# EAGLE board axiom_beta_plugin_module_TE0714_SDI_v0.6-Beta.730f7630 (EAGLE 7.7.0)
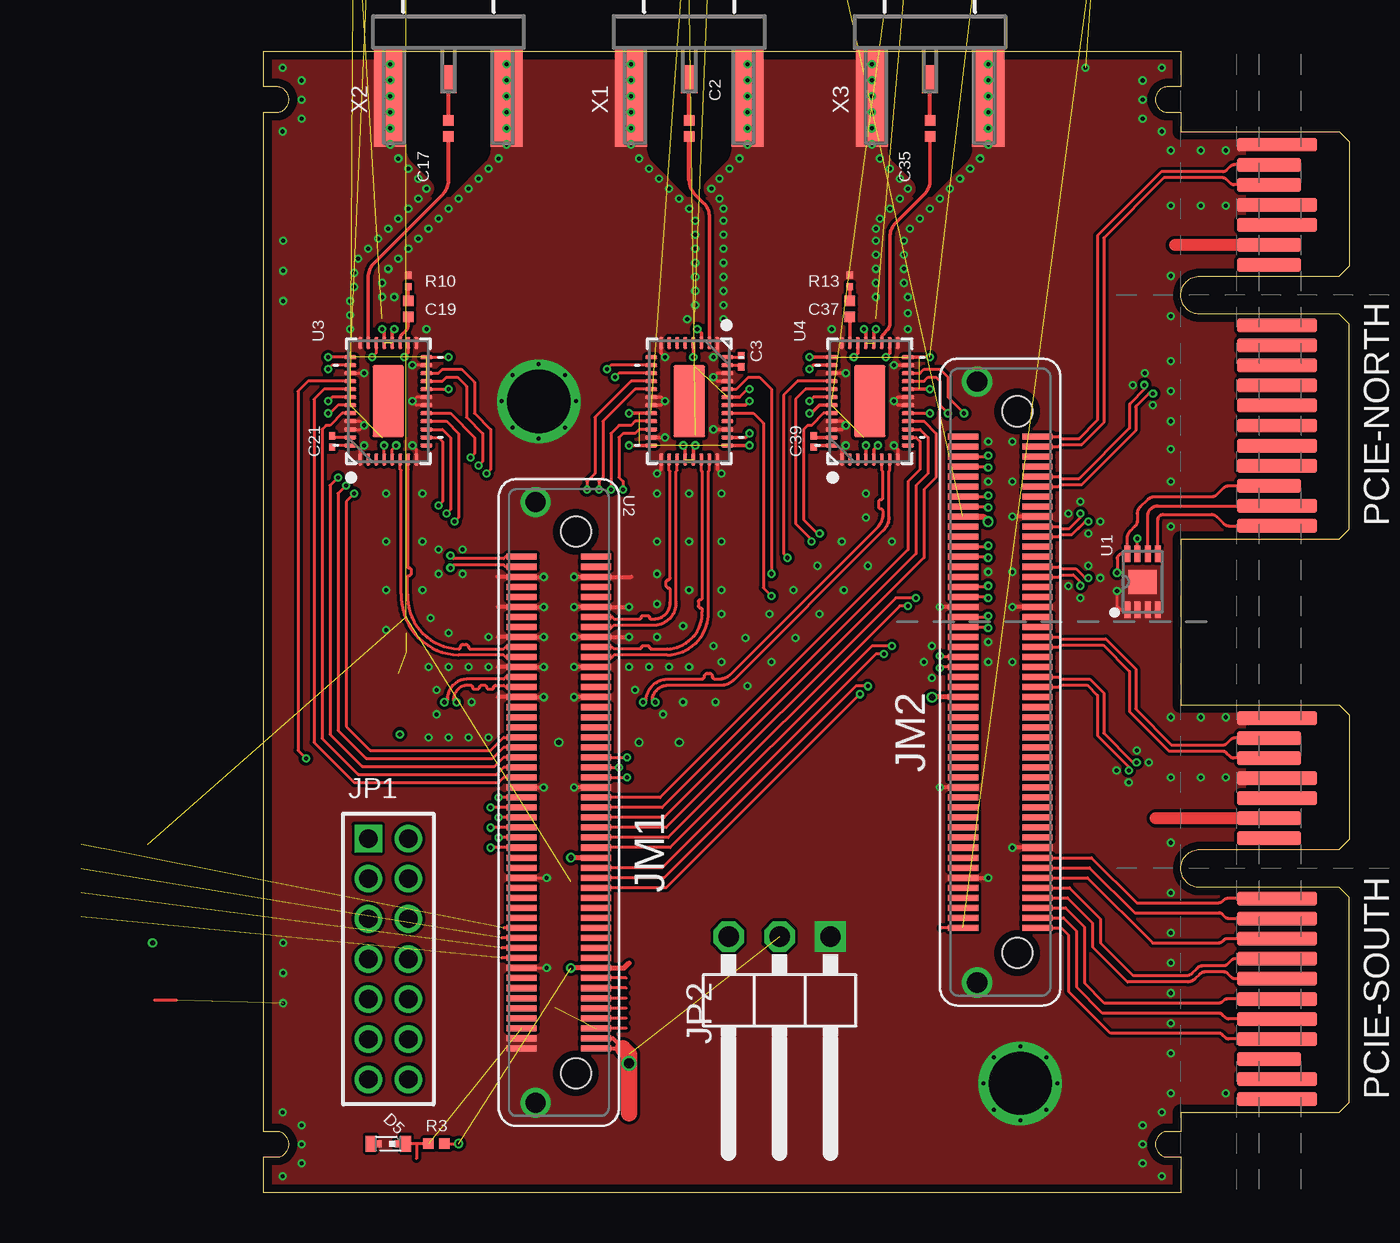
[diagram p0: board, top side]
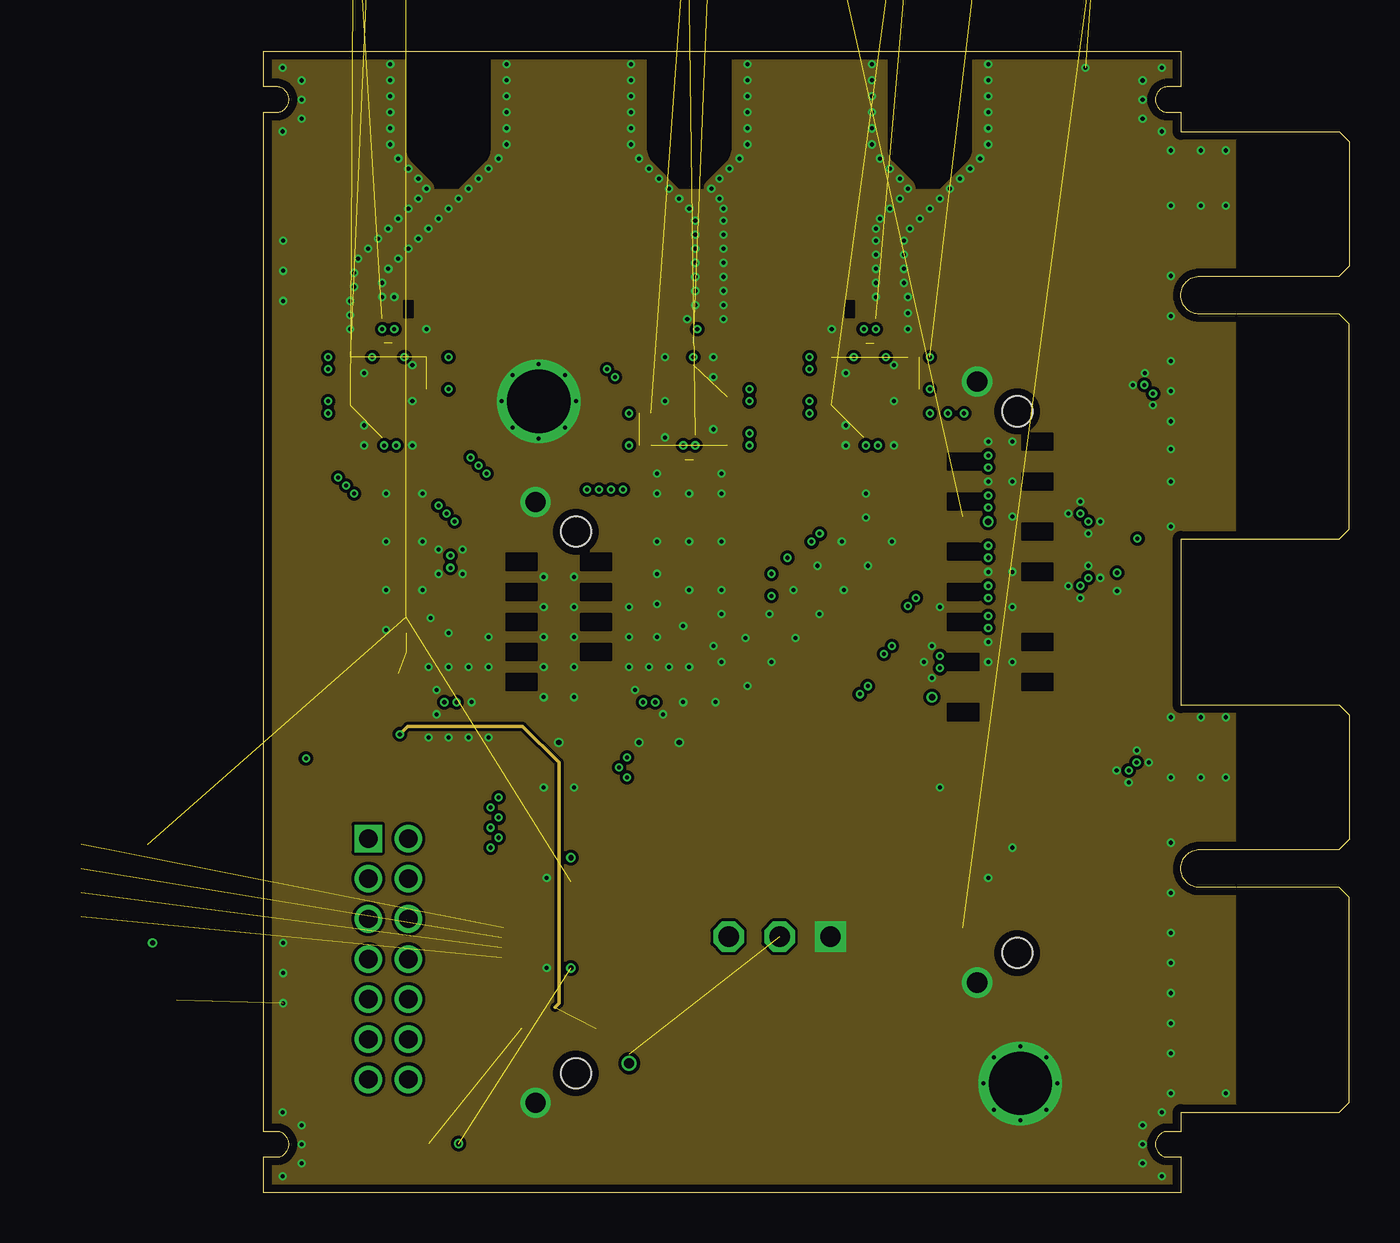
[diagram p1: board, inner layer Route2]
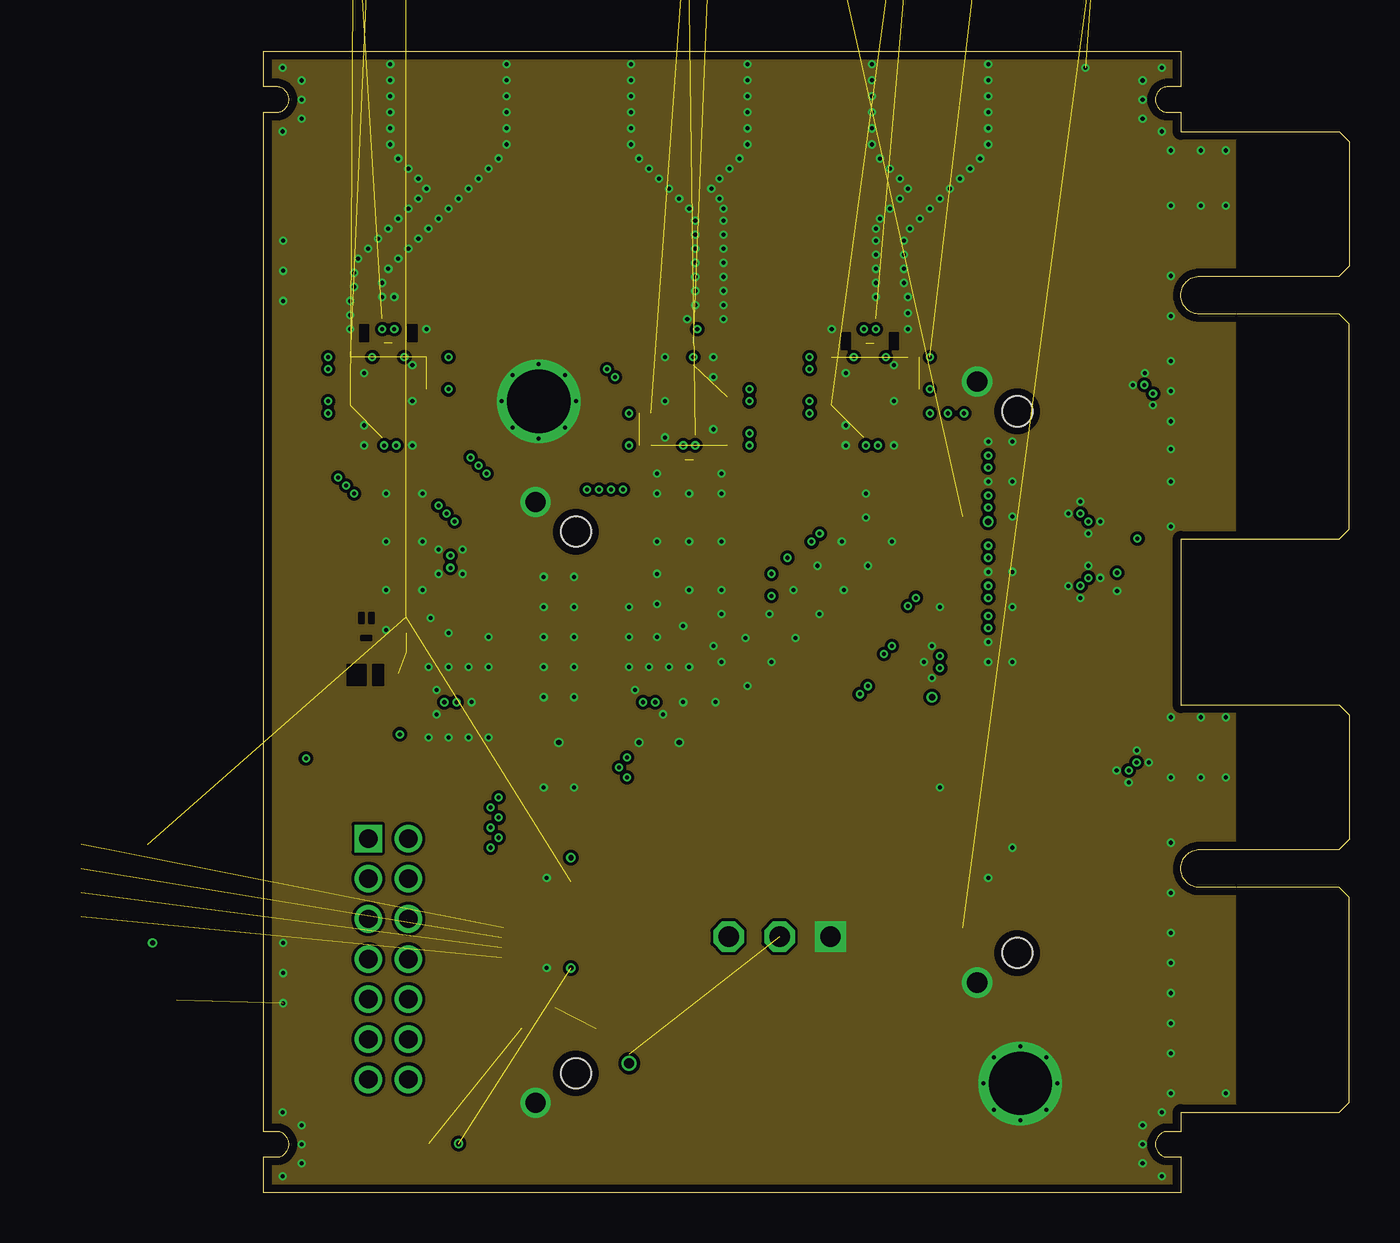
[diagram p2: board, inner layer Route15]
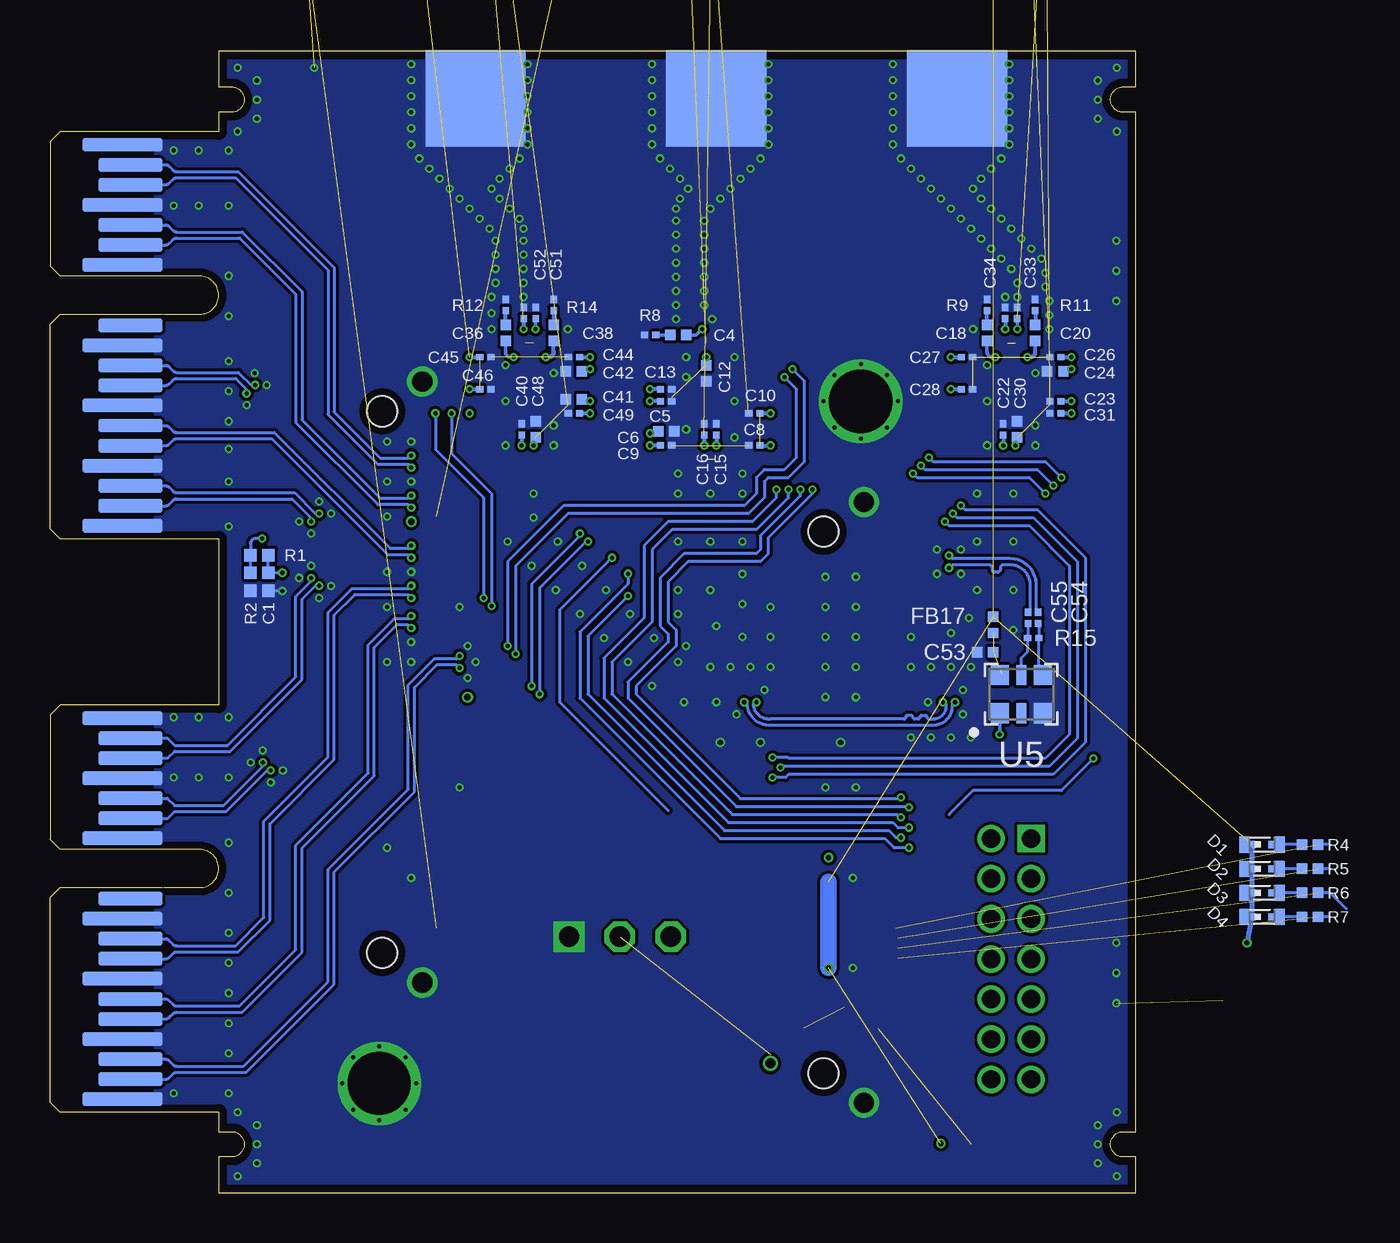
[diagram p3: board, bottom side, seen from below]

Size 54.12 x 56.9 mm. Coordinates in mm from the lower left corner, seen from the top.
Outline: 45.72,32.59 45.72,24.31
Outline: 45.72,52.89 45.72,53.85 45.09,53.85 arc-90 44.45,54.48 arc-90 45.09,55.12 45.72,55.12 45.72,56.9 0,56.9 0,55.12 0.63,55.12 arc-90 1.27,54.48 arc-90 0.63,53.85 0,53.85 0,3.05 0.63,3.05 arc-90 1.27,2.41 arc-90 0.63,1.78 0,1.78 0,0 45.72,0 45.72,1.78 45.09,1.78 arc-90 44.45,2.41 arc-90 45.09,3.05 45.72,3.05 45.72,4.01
Copper layers (1*2*15*16): Top 0.035559375mm / dielectric 0.17018125mm / Route2 0.01778125mm / dielectric 47mil / Route15 0.01778125mm / dielectric 0.17018125mm / Bottom 0.035559375mm
Design rules "OSHPark-4layer-tuned *": minimum track width 5mil, minimum drill 8mil, track to track 5mil, track to pad 5mil, pad to pad 5mil, via to via 5mil, smd to smd 5mil, copper to edge 15mil, drill to drill 6mil, minimum pad ring 4mil, minimum via ring 4mil, stop-mask expansion 2mil, vias tented up to drill 25mil, thermal gap 6mil
Net classes: 0 default: width 0.152 mm, drill 0.203 mm, clearance 0.152 mm; 1 LVDS: width 0.152 mm, drill 0.203 mm, clearance 0.152 mm; 2 75Ohm: width 0.178 mm, drill 0.203 mm, clearance 0.254 mm; 3 MGT: width 0.152 mm, drill 0.203 mm, clearance 0.356 mm
tKeepout: area 43.5,52.9 to 46.7,56.1; area 43.5,0.8 to 46.7,4; area -1,52.9 to 2.2,56.1; area -1,0.8 to 2.2,4
bKeepout: area 43.5,52.9 to 46.7,56.1; area 43.5,0.8 to 46.7,4; area -1,52.9 to 2.2,56.1; area -1,0.8 to 2.2,4

## Footprints (pad centres in the part's own frame; a part is rotated, then mirrored left to right if it is on the bottom)
0402-B = smd 0.62 x 0.62: 1 -0.45,0; 2 0.45,0
0402-C = smd 0.52 x 0.52: 1 -0.4,0; 2 0.4,0
0201-C = smd 0.36 x 0.32: 1 -0.28,0; 2 0.28,0
SMARTLED-TTW = smd 0.8 x 0.5: A 0,-0.875; C 0,0.875 | smd 0.35 x 0.35: A@1 0,-0.5; C@1 0,0.5
LSHM-150-XX.X-XX-DV-A-S = smd 0.3 x 1.5: 1 12.25,-1.85; 2 12.25,1.85; 3 11.75,-1.85; 4 11.75,1.85; 5 11.25,-1.85; 6 11.25,1.85; 7 10.75,-1.85; 8 10.75,1.85; 9 10.25,-1.85; 10 10.25,1.85; 11 9.75,-1.85; 12 9.75,1.85; 13 9.25,-1.85; 14 9.25,1.85; 15 8.75,-1.85; 16 8.75,1.85; 17 8.25,-1.85; 18 8.25,1.85; 19 7.75,-1.85; 20 7.75,1.85; 21 7.25,-1.85; 22 7.25,1.85; 23 6.75,-1.85; 24 6.75,1.85; 25 6.25,-1.85; 26 6.25,1.85; 27 5.75,-1.85; 28 5.75,1.85; 29 5.25,-1.85; 30 5.25,1.85; 31 4.75,-1.85; 32 4.75,1.85; 33 4.25,-1.85; 34 4.25,1.85; 35 3.75,-1.85; 36 3.75,1.85; 37 3.25,-1.85; 38 3.25,1.85; 39 2.75,-1.85; 40 2.75,1.85; 41 2.25,-1.85; 42 2.25,1.85; 43 1.75,-1.85; 44 1.75,1.85; 45 1.25,-1.85; 46 1.25,1.85; 47 0.75,-1.85; 48 0.75,1.85; 49 0.25,-1.85; 50 0.25,1.85; 51 -0.25,-1.85; 52 -0.25,1.85; 53 -0.75,-1.85; 54 -0.75,1.85; 55 -1.25,-1.85; 56 -1.25,1.85; 57 -1.75,-1.85; 58 -1.75,1.85; 59 -2.25,-1.85; 60 -2.25,1.85; 61 -2.75,-1.85; 62 -2.75,1.85; 63 -3.25,-1.85; 64 -3.25,1.85; 65 -3.75,-1.85; 66 -3.75,1.85; 67 -4.25,-1.85; 68 -4.25,1.85; 69 -4.75,-1.85; 70 -4.75,1.85; 71 -5.25,-1.85; 72 -5.25,1.85; 73 -5.75,-1.85; 74 -5.75,1.85; 75 -6.25,-1.85; 76 -6.25,1.85; 77 -6.75,-1.85; 78 -6.75,1.85; 79 -7.25,-1.85; 80 -7.25,1.85; 81 -7.75,-1.85; 82 -7.75,1.85; 83 -8.25,-1.85; 84 -8.25,1.85; 85 -8.75,-1.85; 86 -8.75,1.85; 87 -9.25,-1.85; 88 -9.25,1.85; 89 -9.75,-1.85; 90 -9.75,1.85; 91 -10.25,-1.85; 92 -10.25,1.85; 93 -10.75,-1.85; 94 -10.75,1.85; 95 -11.25,-1.85; 96 -11.25,1.85; 97 -11.75,-1.85; 98 -11.75,1.85; 99 -12.25,-1.85; 100 -12.25,1.85 | drill 1 pad 1.5: F1 14.975,1.15; F2 -14.975,1.15 | hole 1.5: -13.5,-0.85; 13.5,-0.85
2X07M = drill 0.914 square: 1 -6,-1 | drill 0.914: 2 -6,1; 3 -4,-1; 4 -4,1; 5 -2,-1; 6 -2,1; 7 0,-1; 8 0,1; 9 2,-1; 10 2,1; 11 4,-1; 12 4,1; 13 6,-1; 14 6,1
1X03/90-S = drill 1.016 square: 1 -2.54,-3.81 | drill 1.016 octagon: 2 0,-3.81; 3 2.54,-3.81
1X02-S = drill 1.016 square: 1 -1.27,0 | drill 1.016 octagon: 2 1.27,0
PCIE-36-AXIOM = smd 0.7 x 4 bottom: A1 -11.5,3.6; A4 -8.5,3.6; A7 -5.5,3.6; A10 -2.5,3.6; A12 1.5,3.6; A15 4.5,3.6; A18 7.5,3.6 | smd 0.7 x 3.2 bottom: A2 -10.5,4; A3 -9.5,4; A5 -7.5,4; A6 -6.5,4; A8 -4.5,4; A9 -3.5,4; A11 -1.5,4; A13 2.5,4; A14 3.5,4; A16 5.5,4; A17 6.5,4 | smd 0.7 x 4: B1 -11.5,3.6; B2 -10.5,3.6; B4 -8.5,3.6; B5 -7.5,3.6; B6 -6.5,3.6; B7 -5.5,3.6; B8 -4.5,3.6; B9 -3.5,3.6; B10 -2.5,3.6; B11 -1.5,3.6; B14 3.5,3.6; B15 4.5,3.6; B18 7.5,3.6 | smd 0.7 x 3.2: B3 -9.5,4; B12 1.5,4; B13 2.5,4; B16 5.5,4; B17 6.5,4
DFN200X300X100-9N = smd 0.813 x 0.305: 1 -1.397,0.762; 2 -1.397,0.254; 3 -1.397,-0.254; 4 -1.397,-0.762; 5 1.397,-0.762; 6 1.397,-0.254; 7 1.397,0.254; 8 1.397,0.762 | smd 1.194 x 1.397: EP 0,0
UQFN40P600X400X100-41N = smd 0.6 x 0.2: 1 -2.9,1.4; 2 -2.9,1; 3 -2.9,0.6; 4 -2.9,0.2; 5 -2.9,-0.2; 6 -2.9,-0.6; 7 -2.9,-1; 8 -2.9,-1.4; 21 2.9,-1.4; 22 2.9,-1; 23 2.9,-0.6; 24 2.9,-0.2; 25 2.9,0.2; 26 2.9,0.6; 27 2.9,1; 28 2.9,1.4 | smd 0.2 x 0.6: 9 -2.2,-1.9; 10 -1.8,-1.9; 11 -1.4,-1.9; 12 -1,-1.9; 13 -0.6,-1.9; 14 -0.2,-1.9; 15 0.2,-1.9; 16 0.6,-1.9; 17 1,-1.9; 18 1.4,-1.9; 19 1.8,-1.9; 20 2.2,-1.9; 29 2.2,1.9; 30 1.8,1.9; 31 1.4,1.9; 32 1,1.9; 33 0.6,1.9; 34 0.2,1.9; 35 -0.2,1.9; 36 -0.6,1.9; 37 -1,1.9; 38 -1.4,1.9; 39 -1.8,1.9; 40 -2.2,1.9 | smd 3.6 x 1.58: EP 0,0
3.2X2.5 = smd 0.9 x 1: 1 -1.075,-0.95; 3 1.075,-0.95; 4 1.075,0.95; 6 -1.075,0.95 | smd 0.5 x 1: 2 0,-0.95; 5 0,0.95
HDBNC_EDGE_2SIDE = smd 1.4 x 0.8: 1 -1.55,0 | smd 4.8 x 1.6: 2@1 -2.5,-2.9; 2@2 -2.5,2.9 | smd 4.8 x 5 bottom: 2@3 -2.5,0.3

## Placement (x,y rotation side)
C1  [0402-B]  43.24,30.45 270 bottom
C2  4u7  [0402-C]  21.22,53.05 270 top
C3  470n  [0201-C]  23.82,41.45 90 top
C4  4u7  [0402-C]  22.82,42.75 180 bottom
C5  10u  [0201-C]  23.42,39.45 0 bottom
C6  10u  [0402-C]  23.42,37.95 0 bottom
C7  10u  [0402-C]  20.58,86.41 180 top  (outside the outline)
C8  100n  [0201-C]  19.02,37.25 180 bottom
C9  100n  [0201-C]  23.42,37.25 0 bottom
C10  100n  [0201-C]  19.02,38.85 180 bottom
C11  10u  [0402-C]  20.94,83.23 180 top  (outside the outline)
C12  10u  [0402-C]  21.42,40.85 270 bottom
C13  1u  [0201-C]  23.42,40.05 0 bottom
C14  10u  [0402-C]  20.38,91.13 180 top  (outside the outline)
C15  100n  [0201-C]  20.92,38.05 90 bottom
C16  100n  [0201-C]  21.52,38.05 90 bottom
C17  4u7  [0402-C]  9.22,53.05 90 top
C18  4u7  [0402-C]  7.42,42.85 90 bottom
C19  4u7  [0402-C]  7.22,44.05 90 top
C20  4u7  [0402-C]  5.02,42.85 90 bottom
C21  470n  [0201-C]  3.42,37.45 270 top
C22  100n  [0201-C]  6.62,38.05 90 bottom
C23  10u  [0201-C]  4.02,39.45 180 bottom
C24  10u  [0402-C]  4.02,40.95 180 bottom
C25  10u  [0402-C]  3.49,88.44 180 top  (outside the outline)
C26  100n  [0201-C]  4.02,41.65 180 bottom
C27  100n  [0201-C]  8.42,41.65 0 bottom
C28  100n  [0201-C]  8.42,40.05 0 bottom
C29  10u  [0402-C]  2.86,93.06 180 top  (outside the outline)
C30  10u  [0402-C]  5.92,38.05 90 bottom
C31  1u  [0201-C]  4.02,38.85 180 bottom
C32  10u  [0402-C]  3.06,96.67 0 top  (outside the outline)
C33  100n  [0201-C]  5.92,43.85 90 bottom
C34  100n  [0201-C]  6.52,43.85 90 bottom
C35  4u7  [0402-C]  33.22,53.05 90 top
C36  4u7  [0402-C]  31.42,42.85 90 bottom
C37  4u7  [0402-C]  29.22,44.05 90 top
C38  4u7  [0402-C]  29.02,42.85 90 bottom
C39  470n  [0201-C]  27.42,37.45 270 top
C40  100n  [0201-C]  30.62,38.05 90 bottom
C41  10u  [0402-C]  28.02,39.55 180 bottom
C42  10u  [0402-C]  28.02,40.95 180 bottom
C43  10u  [0402-C]  36.3,92.04 180 top  (outside the outline)
C44  100n  [0201-C]  28.02,41.65 180 bottom
C45  100n  [0201-C]  32.42,41.65 0 bottom
C46  100n  [0201-C]  32.42,40.05 0 bottom
C47  10u  [0402-C]  35.66,96.66 180 top  (outside the outline)
C48  10u  [0402-C]  29.92,38.05 90 bottom
C49  1u  [0201-C]  28.02,38.85 180 bottom
C50  10u  [0402-C]  35.86,100.27 0 top  (outside the outline)
C51  100n  [0201-C]  29.92,43.85 90 bottom
C52  100n  [0201-C]  30.52,43.85 90 bottom
C53  470n  [0402-C]  7.52,26.95 180 bottom
C54  100n  [0201-C]  4.87,28.65 90 bottom
C55  100n  [0201-C]  5.37,28.65 90 bottom
D1  [SMARTLED-TTW]  -6.28,17.35 270 bottom  (outside the outline)
D2  [SMARTLED-TTW]  -6.28,16.15 270 bottom  (outside the outline)
D3  [SMARTLED-TTW]  -6.28,14.95 270 bottom  (outside the outline)
D4  [SMARTLED-TTW]  -6.28,13.75 270 bottom  (outside the outline)
D5  [SMARTLED-TTW]  6.22,2.45 90 top
FB1  [0402-C]  23.12,86.13 180 top  (outside the outline)
FB2  [0402-C]  23.48,82.95 180 top  (outside the outline)
FB3  [0402-C]  23.2,91.21 180 top  (outside the outline)
FB4  [0402-C]  5.95,88.19 0 top  (outside the outline)
FB5  [0402-C]  5.05,93.06 180 top  (outside the outline)
FB6  [0402-C]  6.67,97.25 180 top  (outside the outline)
FB7  [0402-C]  38.75,91.79 0 top  (outside the outline)
FB8  [0402-C]  37.84,96.66 180 top  (outside the outline)
FB9  [0402-C]  39.48,100.85 180 top  (outside the outline)
FB17  [0402-C]  7.12,28.3 270 bottom
JM1  LSHM-150-XX.X-XX-DV-A-S  [LSHM-150-XX.X-XX-DV-A-S]  14.72,19.45 90 top
JM2  LSHM-150-XX.X-XX-DV-A-S  [LSHM-150-XX.X-XX-DV-A-S]  36.72,25.45 90 top
JP1  [2X07M]  6.22,11.65 270 top
JP2  [1X03/90-S]  25.72,8.95 180 top
JP3  [1X02-S]  41.84,66.82 90 top  (outside the outline)
LOGO2  OSHW_LOGO_FILLX0100-NT  [OSHW_FILLX100_NOTEXT]  38.11,-33.91 90 bottom  (outside the outline)
PCIE-NORTH  PCIE-36-AXIOM  [PCIE-36-AXIOM]  54.12,44.74 90 top  (not fitted)
PCIE-SOUTH  PCIE-36-AXIOM  [PCIE-36-AXIOM]  54.12,16.16 90 top  (not fitted)
R1  10k  [0402-B]  43.69,31.78 180 bottom
R2  1k  [0402-B]  44.13,30.45 270 bottom
R3  10k  [0402-C]  8.62,2.45 0 top
R4  10k  [0402-C]  -8.68,17.35 180 bottom  (outside the outline)
R5  10k  [0402-C]  -8.68,16.15 180 bottom  (outside the outline)
R6  10k  [0402-C]  -8.68,14.95 180 bottom  (outside the outline)
R7  10k  [0402-C]  -8.68,13.75 180 bottom  (outside the outline)
R8  [0201-C]  24.22,42.75 180 bottom
R9  75R  [0201-C]  7.42,44.25 90 bottom
R10  75R  [0201-C]  7.22,45.45 90 top
R11  75R  [0201-C]  5.02,44.25 90 bottom
R12  75R  [0201-C]  31.42,44.25 90 bottom
R13  75R  [0201-C]  29.22,45.45 90 top
R14  75R  [0201-C]  29.02,44.25 90 bottom
R15  100R  [0201-C]  5.12,27.65 180 bottom
U1  BR24G04NUX  [DFN200X300X100-9N]  43.81,30.45 90 top
U2  GS12241  [UQFN40P600X400X100-41N]  21.22,39.45 270 top
U3  GS12281  [UQFN40P600X400X100-41N]  6.22,39.45 90 top
U4  GS12281  [UQFN40P600X400X100-41N]  30.22,39.45 90 top
U5  DSC11XX-3.2X2.5  [3.2X2.5]  5.72,24.85 0 bottom
X1  HDBNC  [HDBNC_EDGE_2SIDE]  21.22,57.05 90 top
X2  HDBNC  [HDBNC_EDGE_2SIDE]  9.22,57.05 90 top
X3  HDBNC  [HDBNC_EDGE_2SIDE]  33.22,57.05 90 top

## Library data of the parts
C1-C55 FB1-FB9 FB17 R1-R15 = generic-rcl
D1-D5 = led
JM1 JM2 = LSHM-150-XX.X-XX-DV-A-S
JP1-JP3 = pinhead-2
LOGO2 = ohw-logo
PCIE-NORTH PCIE-SOUTH = PCIe
U1 = eeprom
U2-U4 = gs122xx
U5 = dsc11xx
X1-X3 = hdbnc

## Nets
1V8 [LVDS]: FB1.1 FB2.1 FB3.1 FB4.1 FB5.1 FB7.1 FB8.1 JM2.18
3V3 [LVDS]: D1.A@1 D2.A@1 D3.A@1 D4.A@1 FB6.1 FB9.1 FB17.1 JM1.83 R3.2
ADC_N: JM1.27
ADC_P: JM1.25
B14_L0: JM2.99 PCIE-SOUTH.B4
B14_L4_N: JM2.57
B14_L4_P: JM2.55
B14_L5_N: JM2.58
B14_L5_P: JM2.56
B14_L7_N: JM2.59
B14_L7_P: JM2.61
B14_L8_N: JM2.62
B14_L8_P: JM2.60
B14_L9_N: JM2.66
B14_L9_P: JM2.64
B14_L10_N: JM2.77
B14_L10_P: JM2.75
B14_L11_N: JM2.74
B14_L11_P: JM2.76
B14_L12_N: JM2.84
B14_L12_P: JM2.82
B14_L13_N: JM2.86
B14_L13_P: JM2.88
B14_L14_N: JM2.78
B14_L14_P: JM2.80
B14_L15_N: JM2.65
B14_L15_P: JM2.63
B14_L16_N: JM2.81
B14_L16_P: JM2.79
B14_L17_N: JM2.89 PCIE-SOUTH.B9
B14_L17_P: JM2.91 PCIE-SOUTH.B8
B14_L18_N: JM2.85 PCIE-SOUTH.B11
B14_L18_P: JM2.87 PCIE-SOUTH.B10
B14_L19_N: JM2.94
B14_L19_P: JM2.92
B14_L20_N: JM2.95 PCIE-SOUTH.B6
B14_L20_P: JM2.93 PCIE-SOUTH.B7
B14_L21_N: JM1.95 U5.1
B14_L21_P: JM1.93
B14_L22_N: JM2.96
B14_L22_P: JM2.98
B14_L23_N: JM1.89
B14_L23_P: JM1.91
B14_L24_N: JM1.85
B14_L24_P: JM1.87
B14_L25: JM2.97 PCIE-SOUTH.B5
B15_L1_N [LVDS]: JM2.14 PCIE-NORTH.A14
B15_L1_P [LVDS]: JM2.16 PCIE-NORTH.A13
B15_L2_N [LVDS]: JM2.20
B15_L2_P [LVDS]: JM2.22
B15_L3_N: JM2.4
B15_L3_P: JM2.2
B15_L4_N: JM2.10
B15_L4_P: JM2.12
B15_L5_N [LVDS]: JM2.8 PCIE-NORTH.A16
B15_L5_P [LVDS]: JM2.6 PCIE-NORTH.A17
B15_L6_N: JM2.26 PCIE-NORTH.A5
B15_L6_P: JM2.24 PCIE-NORTH.A6
B15_L7_N [LVDS]: JM2.1 PCIE-NORTH.B17
B15_L7_P [LVDS]: JM2.3 PCIE-NORTH.B16
B15_L8_N: JM2.7
B15_L8_P: JM2.5
B15_L9_N: JM2.15
B15_L9_P: JM2.13
B15_L10_N [LVDS]: JM2.11 PCIE-NORTH.A8
B15_L10_P [LVDS]: JM2.9 PCIE-NORTH.A9
B15_L11_N: JM2.30
B15_L11_P: JM2.28
B15_L12_N: JM2.34 PCIE-SOUTH.A8
B15_L12_P: JM2.32 PCIE-SOUTH.A9
B15_L13_N: JM2.38 PCIE-SOUTH.A6
B15_L13_P: JM2.40 PCIE-SOUTH.A5
B15_L14_N: JM2.42
B15_L14_P: JM2.44
B15_L15_N: JM2.19 PCIE-NORTH.A3
B15_L15_P: JM2.21 PCIE-NORTH.A2
B15_L16_N: JM2.23
B15_L16_P: JM2.25
B15_L17_N: JM2.31
B15_L17_P: JM2.33
B15_L18_N: JM2.27 PCIE-SOUTH.A17
B15_L18_P: JM2.29 PCIE-SOUTH.A16
B15_L19_N: JM2.41 PCIE-SOUTH.B17
B15_L19_P: JM2.43 PCIE-SOUTH.B16
B15_L20_N: JM2.50
B15_L20_P: JM2.52
B15_L21_N: JM2.45
B15_L21_P: JM2.47
B15_L22_N: JM2.46 PCIE-SOUTH.A3
B15_L22_P: JM2.48 PCIE-SOUTH.A2
B15_L23_N [LVDS]: JM2.51 PCIE-SOUTH.A13
B15_L23_P [LVDS]: JM2.49 PCIE-SOUTH.A14
B15_L24_N: JM2.37
B15_L24_P: JM2.39
B34_L1_N: JM1.37
B34_L1_P: JM1.35
B34_L2_N: JM1.33
B34_L2_P: JM1.31
B34_L3_N: JM1.42 U3.13
B34_L3_P: JM1.40 U3.17
B34_L4_N: JM1.41 U3.12
B34_L4_P: JM1.39
B34_L5_N: JM1.45 U3.10
B34_L5_P: JM1.43 U3.11
B34_L6_N: JM1.34
B34_L6_P: JM1.32
B34_L7_N: JM1.38 U3.18
B34_L7_P: JM1.36
B34_L8_N: JM1.52 U2.13
B34_L8_P: JM1.50 U2.12
B34_L9_N: JM1.46 U3.33
B34_L9_P: JM1.44 U3.36
B34_L10_N: JM1.51 U4.11
B34_L10_P: JM1.49 U4.10
B34_L11_N: JM1.53 U4.12
B34_L11_P: JM1.55 U4.18
B34_L12_N: JM1.57 U4.17
B34_L12_P: JM1.59 U2.11
B34_L13_N: JM1.56 U2.18
B34_L13_P: JM1.54 U2.17
B34_L14_N: JM1.60 U2.36
B34_L14_P: JM1.58 U2.33
B34_L15_N: JM1.62
B34_L15_P: JM1.64
B34_L16_N: JM1.68
B34_L16_P: JM1.70
B34_L17_N: JM1.63 U2.10
B34_L17_P: JM1.65 U4.36
B34_L18_N: JM1.74
B34_L18_P: JM1.72
B34_L19_N: JM1.71
B34_L19_P: JM1.73
B34_L20_N: JM1.76 R4.1
B34_L20_P: JM1.78 R5.1
B34_L21_N: JM1.69
B34_L21_P: JM1.67 U4.33
B34_L22_N: JM1.75
B34_L22_P: JM1.77
B34_L23_N: JM1.79
B34_L23_P: JM1.81
B34_L24_N: JM1.80 R6.1
B34_L24_P: JM1.82 R7.1
BOOTMODE: JM2.100 JP3.1
DONE: D5.A@1 JM1.96 R3.1
GND: C1.2 C5.2 C6.2 C7.2 C8.2 C9.2 C10.2 C11.2 C12.2 C13.2 C14.2 C15.2 C16.2 C22.2 C23.2 C24.2 C25.2 C26.2 C27.2 C28.2 C29.2 C30.2 C31.2 C32.2 C33.2 C34.2 C40.2 C41.2 C42.2 C43.2 C44.2 C45.2 C46.2 C47.2 C48.2 C49.2 C50.2 C51.2 C52.2 C53.2 D5.C@1 JM1.5 JM1.6 JM1.11 JM1.12 JM1.17 JM1.18 JM1.23 JM1.24 JM1.29 JM1.30 JM1.47 JM1.48 JM1.66 JM1.84 JM1.98 JM1.100 JM1.F1 JM1.F2 JM2.17 JM2.35 JM2.36 JM2.72 JM2.83 JM2.90 JM2.F1 JM2.F2 JP2.1 JP3.2 PCIE-NORTH.A1 PCIE-NORTH.A4 PCIE-NORTH.A7 PCIE-NORTH.A10 PCIE-NORTH.A12 PCIE-NORTH.A15 PCIE-NORTH.A18 PCIE-NORTH.B15 PCIE-NORTH.B18 PCIE-SOUTH.A1 PCIE-SOUTH.A4 PCIE-SOUTH.A7 PCIE-SOUTH.A10 PCIE-SOUTH.A12 PCIE-SOUTH.A15 PCIE-SOUTH.A18 PCIE-SOUTH.B15 PCIE-SOUTH.B18 R2.2 R8.2 R9.2 R10.2 R11.2 R12.2 R13.2 R14.2 U1.1 U1.2 U1.3 U1.4 U1.EP U2.1 U2.8 U2.14 U2.15 U2.19 U2.21 U2.28 U2.31 U2.37 U2.38 U3.1 U3.8 U3.14 U3.15 U3.19 U3.21 U3.28 U3.31 U3.37 U3.38 U4.1 U4.8 U4.14 U4.15 U4.19 U4.21 U4.28 U4.31 U4.37 U4.38 U5.3 X1.2@1 X1.2@2 X1.2@3 X2.2@1 X2.2@2 X2.2@3 X3.2@1 X3.2@2 X3.2@3
I2C_V: C1.1 PCIE-NORTH.B3 R1.1 U1.8
MGT_CLK0_N [LVDS]: C55.2 JM1.4
MGT_CLK0_P [LVDS]: C54.2 JM1.2
MGT_RX0_N [MGT]: JM1.21 U2.27
MGT_RX0_P [MGT]: JM1.19 U2.26
MGT_RX1_N [MGT]: JM1.15 U2.23
MGT_RX1_P [MGT]: JM1.13 U2.22
MGT_RX2_N [MGT]: JM1.9
MGT_RX2_P [MGT]: JM1.7
MGT_RX3_N [MGT]: JM1.3
MGT_RX3_P [MGT]: JM1.1
MGT_TX0_N [MGT]: JM1.28 U4.6
MGT_TX0_P [MGT]: JM1.26 U4.7
MGT_TX1_N [MGT]: JM1.22 U3.6
MGT_TX1_P [MGT]: JM1.20 U3.7
MGT_TX2_N [MGT]: JM1.16
MGT_TX2_P [MGT]: JM1.14
MGT_TX3_N [MGT]: JM1.10
MGT_TX3_P [MGT]: JM1.8
N$1 [LVDS]: D1.C@1 R4.2
N$2 [LVDS]: D2.C@1 R5.2
N$3 [LVDS]: D3.C@1 R6.2
N$4 [LVDS]: D4.C@1 R7.2
N$7: C3.2 U2.40
N$8: C3.1 U2.39
N$9: C21.2 U3.40
N$10: C21.1 U3.39
N$11: C6.1 U2.30
N$12: C5.1 U2.34
N$13: C18.2 R9.1
N$14: C18.1 U3.22
N$15 [75Ohm]: C19.1 U3.23
N$16: C19.2 R10.1
N$17: C20.1 U3.26
N$18: C20.2 R11.1
N$19: C4.2 R8.1
N$20: C4.1 U2.3
N$21: C24.1 U3.30
N$22: C23.1 U3.34
N$23 [75Ohm]: C17.1 U3.27
N$24: C22.1 U3.5
N$25: C17.2 X2.1
N$34: U3.32
N$35 [75Ohm]: C35.1 U4.23
N$37 [75Ohm]: C2.2 U2.2
N$38: C2.1 X1.1
N$59: C35.2 X3.1
N$78: C39.2 U4.40
N$81: U4.32
N$83: U4.13
N$90: C40.1 U4.5
N$91: C41.1 U4.34
N$92: C42.1 U4.30
N$93: C38.2 R14.1
N$94: C38.1 U4.26
N$95: C37.2 R13.1
N$96: C37.1 U4.27
N$97: C36.1 U4.22
N$98: C36.2 R12.1
N$99: C39.1 U4.39
N$209: PCIE-NORTH.A11
N$216: R1.2 R2.1 U1.7
N$256: PCIE-SOUTH.A11
N_5V: PCIE-NORTH.B12
N_IO0: PCIE-NORTH.B4
N_IO1: PCIE-NORTH.B5
N_IO2: PCIE-NORTH.B6
N_IO3: PCIE-NORTH.B7
N_IO4 [LVDS]: PCIE-NORTH.B8
N_IO5 [LVDS]: PCIE-NORTH.B9
N_IO6: PCIE-NORTH.B10
N_IO7: PCIE-NORTH.B11
N_PCIE_V: PCIE-NORTH.B13
N_VCCIO: PCIE-NORTH.B14
OUT_N: C55.1 R15.2 U5.5
OUT_P: C54.1 R15.1 U5.4
PROG_B: JM1.94
S_5V: PCIE-SOUTH.B12
S_PCIE_V: PCIE-SOUTH.B13
S_VCCIO: PCIE-SOUTH.B14
SCL: PCIE-NORTH.B2 U1.6
SDA: PCIE-NORTH.B1 U1.5
SPI-CLK: JM2.67
SPI-CS: JM2.69
SPI-DQ0: JM2.68
SPI-DQ1: JM2.71
SPI-DQ2: JM2.73
SPI-DQ3: JM2.70
TCK: JM1.90
TDI: JM1.86
TDO: JM1.88
TMS: JM1.92
VCC_4: C11.1 C12.1 C13.1 FB2.2 U2.4 U2.35
VCC_8: C29.1 C30.1 C31.1 FB5.2 U3.4 U3.35
VCC_9: C47.1 C48.1 C49.1 FB8.2 U4.4 U4.35
VCCIO0 [LVDS]: JM2.53
VCCIO15 [LVDS]: JM2.54
VCCIO34: JM1.61
VCCO_4: C14.1 C15.1 C16.1 FB3.2 U2.24 U2.25
VCCO_8: C32.1 C33.1 C34.1 FB6.2 U3.24 U3.25
VCCO_9: C50.1 C51.1 C52.1 FB9.2 U4.24 U4.25
VDD_4: C7.1 C8.1 C9.1 C10.1 FB1.2 U2.16 U2.20 U2.29
VDD_8: C25.1 C26.1 C27.1 C28.1 FB4.2 U3.16 U3.20 U3.29
VDD_9: C43.1 C44.1 C45.1 C46.1 FB7.2 U4.16 U4.20 U4.29
VIN [LVDS]: JM1.97 JM1.99 JP2.2
VSUP: JP2.3
VXX: C53.1 FB17.2 U5.6

## Tracks (layer width: path | path; a pad name or v marks a point on that pad's centre or on a via)
1V8  (via drill 0.33)  (7 unrouted)
  Top 0.305: JM2.18 35.87,33.7 v36.12,33.45
3V3  (via drill 0.25)  (5 unrouted)
  Top 0.152: R3.2 v9.72,2.45
  Top 0.254: v15.32,11.2 JM1.83 17.97,11.2 18.22,11.45
  Bottom 0.254: D1.A@1 D2.A@1 D3.A@1 D4.A@1 v-5.53,12.45
  Bottom 0.813: 15.32,15.5 v15.32,11.2
B14_L0
  Top 0.152: PCIE-SOUTH.B4 48.11,7.66 arc-45 47.93,7.73 47.79,7.88 arc45 47.62,7.95 42.22,7.95 40.12,10.05 40.12,12.85 39.77,13.2 JM2.99
B14_L17_N
  Top 0.152: PCIE-SOUTH.B9 48.04,12.66 arc45 47.86,12.59 47.79,12.52 arc-45 47.62,12.45 44.32,12.45 41.07,15.7 JM2.89
B14_L17_P
  Top 0.152: PCIE-SOUTH.B8 48.42,11.66 arc45 48.24,11.59 48.04,11.39 arc-45 47.87,11.31 46.86,11.31 arc45 46.51,11.17 46.27,10.93 arc-45 45.99,10.81 43.35,10.81 41.72,12.45 41.72,13.65 40.17,15.2 JM2.91
B14_L18_N
  Top 0.152: PCIE-SOUTH.B11 48.04,14.66 arc45 47.86,14.59 47.79,14.52 arc-45 47.62,14.45 43.52,14.45 41.27,16.7 JM2.85
B14_L18_P
  Top 0.152: PCIE-SOUTH.B10 48.11,13.66 arc-45 47.93,13.73 47.79,13.88 arc45 47.62,13.95 43.42,13.95 41.17,16.2 JM2.87
B14_L20_N
  Top 0.152: PCIE-SOUTH.B6 48.04,9.66 arc45 47.86,9.59 47.79,9.52 arc-45 47.62,9.45 41.92,9.45 40.92,10.45 40.92,13.25 39.97,14.2 JM2.95
B14_L20_P
  Top 0.152: PCIE-SOUTH.B7 48.42,10.66 arc-45 48.24,10.73 48.04,10.93 arc45 47.87,11.01 46.95,11.01 arc45 46.67,10.89 46.43,10.66 arc-45 46.08,10.51 43.06,10.51 41.32,12.25 41.32,13.45 40.07,14.7 JM2.93
B14_L21_N  (via drill 0.2)  (1 unrouted)
  Top 0.152: 18.07,8.2 JM1.95
  Route2 0.178: v6.8,22.85 7.2,23.25 12.92,23.25 14.72,21.45 14.72,9.45 14.52,9.25
  Bottom 0.14: 6.72,23.82 U5.1
  Bottom 0.178: U5.1 v6.8,22.85
B14_L21_P
  Top 0.152: 18.07,8.7 JM1.93
B14_L23_N
  Top 0.152: 18.07,9.7 JM1.89
B14_L23_P
  Top 0.152: 18.07,9.2 JM1.91
B14_L24_N
  Top 0.152: 18.07,10.7 JM1.85
B14_L24_P
  Top 0.152: 18.07,10.2 JM1.87
B14_L25
  Top 0.152: PCIE-SOUTH.B5 48.11,8.66 arc-45 47.93,8.73 47.79,8.88 arc45 47.62,8.95 41.82,8.95 40.52,10.25 40.52,13.05 39.87,13.7 JM2.97
B15_L1_N  (via drill 0.2)
  Top 0.152: JM2.14 36.07,34.7 v36.12,34.75
  Bottom 0.152: PCIE-NORTH.A14 48.37,48.24 arc45 48.19,48.16 47.99,47.96 arc-45 47.82,47.89 44.54,47.89 41.57,44.91 41.57,38.51 37.66,34.6 36.27,34.6 v36.12,34.75
B15_L1_P  (via drill 0.2)
  Top 0.152: JM2.16 36.07,34.2 v36.12,34.15
  Bottom 0.152: PCIE-NORTH.A13 48.37,47.24 arc-45 48.19,47.31 47.99,47.51 arc45 47.82,47.58 44.67,47.58 41.87,44.78 41.87,38.38 37.78,34.3 36.27,34.3 v36.12,34.15
B15_L5_N  (via drill 0.2)
  Top 0.152: JM2.8 36.07,36.2 v36.12,36.15
  Bottom 0.152: PCIE-NORTH.A16 48.37,50.24 arc-45 48.19,50.31 47.99,50.51 arc45 47.82,50.58 44.87,50.58 40.27,45.98 40.27,38.78 37.78,36.3 36.27,36.3 v36.12,36.15
B15_L5_P  (via drill 0.2)
  Top 0.152: JM2.6 36.07,36.7 v36.12,36.75
  Bottom 0.152: PCIE-NORTH.A17 48.37,51.24 arc45 48.19,51.16 47.99,50.96 arc-45 47.82,50.89 44.74,50.89 39.97,46.11 39.97,38.91 37.66,36.6 36.27,36.6 v36.12,36.75
B15_L6_N  (via drill 0.2)
  Top 0.152: JM2.26 36.07,31.7 v36.12,31.65
  Bottom 0.152: PCIE-NORTH.A5 48.37,37.23 arc-45 48.19,37.31 47.99,37.51 arc45 47.82,37.58 43.07,37.58 37.28,31.8 36.27,31.8 v36.12,31.65
B15_L6_P  (via drill 0.2)
  Top 0.152: JM2.24 36.07,32.2 v36.12,32.25
  Bottom 0.152: PCIE-NORTH.A6 48.37,38.23 arc45 48.19,38.16 47.99,37.96 arc-45 47.82,37.89 42.94,37.89 37.16,32.1 36.27,32.1 v36.12,32.25
B15_L7_N
  Top 0.152: PCIE-NORTH.B17 48.37,51.24 arc45 48.19,51.16 47.99,50.96 arc-45 47.82,50.89 44.74,50.89 41.57,47.71 41.57,38.51 40.66,37.6 39.72,37.6 39.62,37.7 JM2.1
B15_L7_P
  Top 0.152: PCIE-NORTH.B16 48.37,50.24 arc-45 48.19,50.31 47.99,50.51 arc45 47.82,50.58 44.87,50.58 41.87,47.59 41.87,38.38 40.78,37.3 39.72,37.3 39.62,37.2 JM2.3
B15_L10_N  (via drill 0.2)
  Top 0.152: v44.34,39.83 44.13,39.84 43.5,39.21 arc45 43.47,39.14 43.47,37.98 40.78,35.3 39.72,35.3 39.62,35.2 JM2.11
  Bottom 0.152: PCIE-NORTH.A8 48.37,40.23 arc-45 48.19,40.31 47.99,40.51 arc45 47.82,40.58 44.87,40.58 44.33,40.04 v44.34,39.83
B15_L10_P  (via drill 0.2)
  Top 0.152: v43.9,40.26 43.91,40.06 43.2,39.34 arc45 43.17,39.27 43.17,38.11 40.66,35.6 39.72,35.6 39.62,35.7 JM2.9
  Bottom 0.152: PCIE-NORTH.A9 48.37,41.23 arc45 48.19,41.16 47.99,40.96 arc-45 47.82,40.89 44.74,40.89 44.11,40.26 v43.9,40.26
B15_L12_N  (via drill 0.2)
  Top 0.152: v36.12,29.65 36.07,29.7 JM2.34
  Bottom 0.152: PCIE-SOUTH.A8 48.36,11.66 arc-45 48.18,11.73 47.99,11.93 arc45 47.82,12 44.75,12 43.17,13.59 43.17,18.38 39.97,21.59 39.97,28.79 38.96,29.8 36.27,29.8 v36.12,29.65
B15_L12_P  (via drill 0.2)
  Top 0.152: v36.12,30.25 36.07,30.2 JM2.32
  Bottom 0.152: PCIE-SOUTH.A9 48.38,12.66 arc45 48.2,12.59 47.99,12.38 arc-45 47.82,12.3 44.88,12.3 43.47,13.71 43.47,18.51 40.27,21.71 40.27,28.91 39.08,30.1 36.27,30.1 v36.12,30.25
B15_L13_N  (via drill 0.2)
  Top 0.152: JM2.38 36.07,28.7 v36.12,28.75
  Bottom 0.152: PCIE-SOUTH.A6 48.38,9.66 arc45 48.2,9.59 47.99,9.38 arc-45 47.82,9.3 44.68,9.3 41.87,12.11 41.87,17.31 38.27,20.91 38.27,27.31 36.98,28.6 36.27,28.6 v36.12,28.75
B15_L13_P  (via drill 0.2)
  Top 0.152: JM2.40 36.07,28.2 v36.12,28.15
  Bottom 0.152: PCIE-SOUTH.A5 48.36,8.66 arc-45 48.18,8.73 47.99,8.93 arc45 47.82,9 44.55,9 41.57,11.98 41.57,17.19 37.97,20.79 37.97,27.19 36.86,28.3 36.27,28.3 v36.12,28.15
B15_L15_N  (via drill 0.2)
  Top 0.152: v40.72,33.85 40.71,33.66 40.16,33.1 39.72,33.1 39.62,33.2 JM2.19
  Bottom 0.152: PCIE-NORTH.A3 48.37,35.23 arc45 48.19,35.16 47.99,34.96 arc-45 47.82,34.89 41.94,34.89 40.91,33.86 v40.72,33.85
B15_L15_P  (via drill 0.2)
  Top 0.152: v41.12,33.45 40.93,33.44 40.63,33.14 40.58,33.1 40.28,32.8 39.72,32.8 39.62,32.7 JM2.21
  Bottom 0.152: PCIE-NORTH.A2 48.37,34.23 arc-45 48.19,34.31 47.99,34.51 arc45 47.82,34.58 42.07,34.58 41.13,33.64 v41.12,33.45
B15_L18_N  (via drill 0.2)
  Top 0.152: JM2.27 39.62,31.2 39.72,31.1 40.48,31.1 40.93,30.66 v41.12,30.65
  Bottom 0.152: PCIE-SOUTH.A17 48.28,22.66 47.92,22.3 45.28,22.3 41.87,25.71 41.87,29.71 41.13,30.46 v41.12,30.65
B15_L18_P  (via drill 0.2)
  Top 0.152: JM2.29 39.62,30.7 39.72,30.8 40.36,30.8 40.71,30.44 v40.72,30.25
  Bottom 0.152: PCIE-SOUTH.A16 48.26,21.66 47.92,22 45.15,22 41.57,25.59 41.57,29.59 40.91,30.24 v40.72,30.25
B15_L19_N
  Top 0.152: PCIE-SOUTH.B17 48.38,22.66 arc45 48.2,22.59 47.99,22.38 arc-45 47.82,22.3 45.28,22.3 43.47,24.11 43.47,26.11 41.98,27.6 39.72,27.6 39.62,27.7 JM2.41
B15_L19_P
  Top 0.152: PCIE-SOUTH.B16 48.36,21.66 arc-45 48.18,21.73 47.99,21.93 arc45 47.82,22 45.15,22 43.17,23.98 43.17,25.98 41.86,27.3 39.72,27.3 39.62,27.2 JM2.43
B15_L22_N  (via drill 0.2)
  Top 0.152: JM2.46 33.77,26.7 v33.72,26.75
  Bottom 0.152: PCIE-SOUTH.A3 48.38,6.66 arc45 48.2,6.59 47.99,6.38 arc-45 47.82,6.3 44.48,6.3 40.27,10.51 40.27,16.11 36.27,20.11 36.27,25.31 34.98,26.6 33.87,26.6 v33.72,26.75
B15_L22_P  (via drill 0.2)
  Top 0.152: JM2.48 33.77,26.2 v33.72,26.15
  Bottom 0.152: PCIE-SOUTH.A2 48.36,5.66 arc-45 48.18,5.73 47.99,5.93 arc45 47.82,6 44.35,6 39.97,10.39 39.97,15.99 35.97,19.98 35.97,25.19 34.86,26.3 33.87,26.3 v33.72,26.15
B15_L23_N  (via drill 0.2)
  Top 0.152: JM2.51 39.62,25.2 39.72,25.3 41.06,25.3 41.57,24.79 41.57,22.79 43.11,21.24 v43.12,21.05
  Bottom 0.152: PCIE-SOUTH.A13 48.26,18.66 47.92,19 45.35,19 43.31,21.04 v43.12,21.05
B15_L23_P  (via drill 0.2)
  Top 0.152: JM2.49 39.62,25.7 39.72,25.6 41.18,25.6 41.87,24.91 41.87,22.91 43.33,21.46 v43.52,21.45
  Bottom 0.152: PCIE-SOUTH.A14 48.28,19.66 47.92,19.3 45.48,19.3 43.53,21.26 v43.52,21.45
B34_L3_N  (via drill 0.2)
  Top 0.152: U3.13 9.32,38.85 10.52,37.65 10.52,36.85 v10.32,36.65 | v3.72,35.65 3.32,35.25 3.32,22.85 4.92,21.25 11.52,21.25 11.97,21.7 JM1.42
  Bottom 0.152: v10.32,36.65 10.12,36.45 4.52,36.45 v3.72,35.65
B34_L3_P  (via drill 0.2)
  Top 0.152: U3.17 8.92,40.45 9.12,40.65 9.67,40.65 10.12,40.2 10.12,38.65 10.92,37.85 10.92,36.45 v10.72,36.25 | v4.12,35.25 3.72,34.85 3.72,23.05 5.12,21.65 11.42,21.65 11.97,22.2 JM1.40
  Bottom 0.152: v10.72,36.25 10.52,36.05 4.92,36.05 v4.12,35.25
B34_L4_N  (via drill 0.2)
  Top 0.152: U3.12 9.12,38.45 9.72,37.85 9.72,33.65 v9.52,33.45 | JM1.41 v18.12,21.7
  Bottom 0.152: v9.52,33.45 9.32,33.25 5.32,33.25 3.32,31.25 3.32,22.85 4.52,21.65 17.32,21.65 17.37,21.7 v18.12,21.7
B34_L5_N  (via drill 0.2)
  Top 0.152: U3.10 8.72,37.65 8.92,37.45 8.92,34.45 v8.72,34.25 | JM1.45 v18.12,20.7
  Bottom 0.152: v8.72,34.25 8.52,34.05 4.92,34.05 2.52,31.65 2.52,22.45 4.12,20.85 17.32,20.85 17.47,20.7 v18.12,20.7
B34_L5_P  (via drill 0.2)
  Top 0.152: U3.11 8.92,38.05 9.32,37.65 9.32,34.05 v9.12,33.85 | JM1.43 v17.72,21.2
  Bottom 0.152: v9.12,33.85 8.92,33.65 5.12,33.65 2.92,31.45 2.92,22.65 4.32,21.25 17.67,21.25 v17.72,21.2
B34_L7_N  (via drill 0.2)
  Top 0.152: U3.18 8.72,40.85 8.92,41.05 9.87,41.05 10.52,40.4 10.52,38.85 11.32,38.05 11.32,36.05 v11.12,35.85 | v4.52,34.85 4.12,34.45 4.12,23.25 5.32,22.05 11.32,22.05 11.97,22.7 JM1.38
  Bottom 0.152: v11.12,35.85 10.92,35.65 5.32,35.65 v4.52,34.85
B34_L8_N  (via drill 0.2)
  Top 0.152: U2.13 18.52,40.05 16.92,38.45 16.92,35.65 16.72,35.45 v16.72,35.05 | JM1.52 v11.32,19.2
  Bottom 0.152: v16.72,35.05 16.72,34.75 18.72,32.75 18.72,32.05 18.92,31.85 22.52,31.85 23.72,30.65 23.72,28.25 23.32,27.85 23.32,27.45 25.32,25.45 25.32,24.65 19.92,19.25 11.37,19.25 v11.32,19.2
B34_L8_P  (via drill 0.2)
  Top 0.152: U2.12 18.32,40.45 16.52,38.65 16.52,35.85 16.12,35.45 v16.12,35.05 | JM1.50 v11.72,19.7
  Bottom 0.152: v16.12,35.05 16.12,34.85 18.32,32.65 18.32,31.85 18.72,31.45 22.32,31.45 23.32,30.45 23.32,28.45 22.92,28.05 22.92,27.25 24.92,25.25 24.92,24.85 19.72,19.65 11.77,19.65 v11.72,19.7
B34_L9_N
  Top 0.152: U3.33 3.02,40.05 2.52,39.55 2.52,22.45 4.52,20.45 11.72,20.45 11.97,20.7 JM1.46
B34_L9_P
  Top 0.152: U3.36 3.92,38.85 3.32,38.25 3.12,38.25 2.92,38.05 2.92,22.65 4.72,20.85 11.62,20.85 11.97,21.2 JM1.44
B34_L10_N
  Top 0.152: U4.11 32.72,38.05 33.12,37.65 33.12,35.85 32.52,35.25 32.52,31.85 19.87,19.2 JM1.51
B34_L10_P
  Top 0.152: U4.10 32.52,37.65 32.72,37.45 32.72,36.05 32.12,35.45 32.12,32.05 19.77,19.7 JM1.49
B34_L11_N
  Top 0.152: U4.12 32.92,38.45 33.52,37.85 33.52,35.65 32.92,35.05 32.92,31.65 19.97,18.7 JM1.53
B34_L11_P  (via drill 0.2)
  Top 0.152: U4.18 32.72,40.85 32.92,41.05 33.72,41.05 34.12,40.65 34.12,39.65 v34.92,38.85 | v32.52,29.65 31.52,29.65 20.07,18.2 JM1.55
  Bottom 0.152: v34.92,38.85 34.92,37.05 32.52,34.65 v32.52,29.65
B34_L12_N  (via drill 0.2)
  Top 0.152: U4.17 32.92,40.45 33.12,40.65 33.52,40.65 33.72,40.45 33.72,39.25 v34.12,38.85 | v32.12,29.25 31.72,29.25 20.17,17.7 JM1.57
  Bottom 0.152: v34.12,38.85 34.12,36.85 32.12,34.85 v32.12,29.25
B34_L12_P  (via drill 0.2)
  Top 0.152: U2.11 17.72,40.85 v17.52,40.65 | v31.32,27.25 30.32,27.25 20.27,17.2 JM1.59
  Bottom 0.152: 17.32,40.45 v17.52,40.65 16.92,40.05 16.92,36.65 17.52,36.05 18.52,36.05 18.92,35.65 18.92,34.85 19.52,34.25 28.52,34.25 31.32,31.45 v31.32,27.25
B34_L13_N  (via drill 0.2)
  Top 0.152: U2.18 18.72,38.05 18.52,37.85 17.92,37.85 17.72,37.65 17.72,35.65 17.92,35.45 v17.92,35.05 | JM1.56 v11.32,18.2
  Bottom 0.152: v17.92,35.05 17.92,34.65 19.12,33.45 23.32,33.45 24.52,32.25 24.52,28.65 26.52,26.65 26.52,24.65 20.32,18.45 12.12,18.45 11.87,18.2 v11.32,18.2
B34_L13_P  (via drill 0.2)
  Top 0.152: U2.17 18.52,38.45 18.32,38.25 17.72,38.25 17.32,37.85 v17.32,35.05 | JM1.54 v11.72,18.7
  Bottom 0.152: v17.32,35.05 17.32,34.65 18.92,33.05 23.12,33.05 24.12,32.05 24.12,28.45 26.12,26.45 26.12,24.85 20.12,18.85 11.87,18.85 v11.72,18.7
B34_L14_N  (via drill 0.2)
  Top 0.152: U2.36 23.57,40.05 24.17,40.65 24.72,40.65 25.32,40.05 v25.32,30.85 | JM1.60 v11.32,17.2
  Bottom 0.152: v25.32,30.85 25.32,30.35 27.72,27.95 27.72,24.65 20.72,17.65 12.52,17.65 12.07,17.2 v11.32,17.2
B34_L14_P  (via drill 0.2)
  Top 0.152: U2.33 24.42,38.85 24.92,38.35 24.92,30.15 v25.32,29.75 | JM1.58 v11.72,17.7
  Bottom 0.152: v25.32,29.75 27.32,27.75 27.32,24.85 20.52,18.05 12.32,18.05 11.97,17.7 v11.72,17.7
B34_L17_N  (via drill 0.2)
  Top 0.152: U2.10 17.32,41.25 v17.12,41.05 | v30.92,26.85 30.52,26.85 19.87,16.2 JM1.63
  Bottom 0.152: 16.92,40.85 v17.12,41.05 16.52,40.45 16.52,36.45 17.32,35.65 18.32,35.65 18.52,35.45 18.52,34.65 19.32,33.85 28.32,33.85 30.92,31.25 v30.92,26.85
B34_L17_P  (via drill 0.2)
  Top 0.152: U4.36 27.92,38.85 27.32,38.25 27.12,38.25 26.92,38.05 26.92,33.55 27.62,32.85 v27.72,32.85 | v30.12,25.25 29.52,25.25 19.97,15.7 JM1.65
  Bottom 0.152: v30.12,25.25 30.12,30.35 27.72,32.75 v27.72,32.85
B34_L20_N  (1 unrouted)
  Top 0.152: JM1.76 11.97,13.2
  Bottom 0.152: -9.68,17.35 R4.1
B34_L20_P  (1 unrouted)
  Top 0.152: JM1.78 11.87,12.7
  Bottom 0.152: -9.68,16.15 R5.1
B34_L21_P  (via drill 0.2)
  Top 0.152: U4.33 27.02,40.05 26.52,39.55 26.52,33.35 27.32,32.55 v27.32,32.45 | v29.72,24.85 20.07,15.2 JM1.67
  Bottom 0.152: v29.72,24.85 29.72,30.15 27.42,32.45 v27.32,32.45
B34_L24_N  (1 unrouted)
  Top 0.152: JM1.80 11.87,12.2
  Bottom 0.152: -10.48,14.15 -9.68,14.95 R6.1
B34_L24_P  (1 unrouted)
  Top 0.152: JM1.82 11.87,11.7
  Bottom 0.152: -9.68,13.75 R7.1
BOOTMODE  (1 unrouted)
  Top 0.152: JM2.100 33.77,13.2
DONE  (1 unrouted)
  Top 0.152: R3.1 7.62,2.45 | 7.62,2.45 D5.A@1 | 7.62,2.45 7.62,1.7
GND  (via drill 0.2, 0.25, 3.15)  (11 unrouted)
  Top 0.152: JM1.84 v14.12,11.2 | JM1.66 v14.12,15.7 | U1.1 42.8,29.05 arc-90 42.55,29.3 v42.55,30 | U3.19 v7.42,41.25 | U3.15 7.62,39.65 v7.42,39.45 7.62,39.25 U3.14 | U3.37 4.82,38.45 v5.02,38.25 4.82,38.05 U3.38 | U3.1 4.82,37.05 v5.02,37.25 | U3.31 v5.02,40.85 | U3.8 7.62,37.05 v7.42,37.25 | -4.33,9.6 -5.43,9.6
  Top 0.178: U4.19 v31.42,41.25 | U4.15 31.62,39.65 v31.42,39.45 31.62,39.25 U4.14 | U4.37 28.82,38.45 v29.02,38.25 28.82,38.05 U4.38 | U4.1 28.82,37.05 v29.02,37.25 | U4.31 v29.02,40.85 | U4.8 31.62,37.05 v31.42,37.25 | U2.38 22.62,40.85 v22.42,40.65 22.62,40.45 U2.37 | U2.31 v22.42,38.05 | U2.1 22.62,41.85 v22.42,41.65 | U2.8 19.82,41.85 v20.02,41.65 | U2.21 19.82,36.05 v19.62,35.85 | U2.28 22.62,36.05 v22.82,35.85 | U2.19 v20.02,37.65 | U2.15 19.82,39.25 v20.02,39.45 19.82,39.65 U2.14
  Top 0.2: JM2.90 v36.12,15.7 | JM2.83 v37.32,17.2 | JM2.17 v37.32,33.7 | JM1.48 v13.97,20.2 | JM1.47 v15.47,20.2 | v13.97,30.7 JM1.6 11.65,30.7 | v13.97,29.2 JM1.12 11.68,29.2 | v13.97,27.7 JM1.18 11.68,27.7 | v13.97,26.2 JM1.24 11.68,26.2 | v13.97,24.7 JM1.30 11.68,24.7 | JM1.29 v15.47,24.7 | JM1.23 v15.47,26.2 | v15.47,27.7 JM1.17 v18.22,27.7 | v15.47,29.2 JM1.11 v18.22,29.2 | v15.47,30.7 JM1.5 18.32,30.7 | JM2.72 v33.72,20.2 | JM2.36 v33.72,29.2 | JM2.35 v37.32,29.2
  Bottom 0.152: v42.55,30 C1.2
  Bottom 0.305: U5.3 4.72,23.9 4.67,23.85
  other vias: 13.72,39.45 37.72,5.45 11.87,39.45 15.57,39.45 13.72,37.6 13.72,41.3 18.72,22.45 20.72,22.45 14.72,22.45 44.77,0.83 43.81,1.46 43.81,2.41 43.81,3.37 44.77,4 44.77,56.07 44.77,52.9 43.81,53.53 43.81,55.44 43.81,54.48 0.95,56.07 0.95,0.83 40.96,56.07 0.95,4 0.95,52.9 1.91,53.53 1.91,55.44 1.91,1.46 1.91,3.37 1.91,54.48 1.91,2.41 47.97,49.2 47.97,51.95 47.97,23.7 47.97,20.7 0.98,47.45 0.98,44.45 0.98,45.95 0.98,12.45 0.98,9.45 0.98,10.95 45.22,6.95 45.22,11.45 45.22,12.95 45.22,17.45 45.22,14.95 45.22,35.45 45.22,39.95 45.22,43.7 45.22,41.45 45.22,45.7 45.22,23.7 45.22,20.7 45.22,51.95 45.22,37.07 46.72,49.2 46.72,23.7 46.72,20.7 46.72,51.95 45.22,49.2 45.22,4.95 45.22,8.45 45.22,33.2 47.97,4.95 45.22,38.45 45.22,9.95 5.92,45.35 6.72,46.55 4.72,46.55 5.22,47.05 5.72,47.55 6.22,48.05 6.72,51.55 7.22,51.05 7.72,50.55 8.12,50.05 7.72,49.55 7.22,49.05 6.72,48.55 4.52,45.85 4.52,45.15 4.32,44.45 4.32,43.75 7.22,47.05 7.72,47.55 8.22,48.05 8.72,48.55 9.22,49.05 9.72,49.55 10.22,50.05 10.72,50.55 11.22,51.05 11.72,51.55 5.92,44.65 30.72,51.55 31.22,51.05 31.72,50.55 32.12,50.05 31.72,49.55 31.22,49.05 28.32,43.05 32.22,48.05 32.72,48.55 33.22,49.05 33.72,49.55 34.22,50.05 34.72,50.55 35.22,51.05 35.72,51.55 6.22,46.05 6.52,44.65 4.32,43.05 8.12,43.05 32.12,43.05 18.22,26.2 19.22,26.2 20.22,26.2 19.62,27.7 21.22,26.2 11.22,26.2 10.22,26.2 9.22,26.2 8.22,26.2 8.62,25.05 8.62,23.85 10.37,24.45 23.72,51.55 23.22,51.05 22.72,50.55 22.32,50.05 22.72,49.55 20.72,49.55 20.22,50.05 19.72,50.55 19.22,51.05 18.72,51.55 18.52,25.05 19.92,23.85 21.22,34.85 21.22,32.45 20.92,28.25 21.22,49.05 21.52,48.45 21.52,47.75 21.52,47.05 21.52,46.35 21.52,45.65 21.52,44.95 21.52,44.25 22.92,48.45 22.92,47.75 22.92,47.05 22.92,46.35 22.92,45.65 22.92,44.95 22.92,44.25 22.92,43.55 21.12,43.55 19.62,34.85 19.62,32.45 19.62,30.85 19.62,29.35 22.82,32.45 22.82,34.85 22.82,30.05 22.82,28.85 22.42,27.25 22.92,49.05 12.12,52.25 12.12,53.05 12.12,53.85 12.12,54.65 12.12,55.45 12.12,56.25 6.32,56.25 6.32,55.45 6.32,54.65 6.32,53.85 6.32,53.05 6.32,52.25 21.22,30.05 7.92,34.85 6.12,34.85 7.92,32.45 6.12,32.45 36.12,52.25 36.12,53.05 36.12,53.85 36.12,54.65 36.12,55.45 36.12,56.25 30.32,56.25 30.32,55.45 30.32,54.65 30.32,53.85 30.32,53.05 30.32,52.25 24.12,52.25 24.12,53.05 24.12,53.85 24.12,54.65 24.12,55.45 24.12,56.25 18.32,56.25 18.32,55.45 18.32,54.65 18.32,53.85 18.32,53.05 18.32,52.25 7.92,30.05 6.12,30.05 40.72,34.45 40.12,33.85 41.12,32.85 41.72,33.45 41.12,31.25 40.72,29.65 41.72,30.65 40.12,30.25 43.52,22.05 44.12,21.45 42.52,21.05 43.12,20.45 36.12,35.45 36.12,37.45 37.32,37.45 37.32,35.45 33.32,27.25 33.32,25.65 32.92,26.45 36.12,27.45 43.92,40.85 43.32,40.25 44.32,39.25 8.72,32.05 9.92,32.05 9.92,30.85 8.72,30.85 30.02,34.85 31.32,32.45 30.02,33.65 30.12,31.25 28.92,30.05 27.72,28.85 26.52,27.65 25.32,26.45 24.12,25.25 28.82,32.45 27.62,31.25 26.42,30.05 25.22,28.85 24.02,27.65 22.82,26.45 22.52,24.45 20.92,24.45 36.12,30.95 37.32,30.95 37.32,26.45 36.12,26.45 36.41,4.14 39.03,6.76 39.03,4.14 36.41,6.76 35.87,5.45 39.57,5.45 37.72,3.6 37.72,7.3 12.41,38.14 15.03,40.76 15.03,38.14 12.41,40.76 31.92,47.45 30.52,47.45 30.72,48.55 30.52,48.05 30.52,46.75 31.92,46.75 30.52,46.05 31.92,46.05 30.52,45.35 31.92,45.35 30.52,44.65 32.12,44.65 32.12,43.85 6.12,28.05 8.32,28.65 11.22,27.7 9.22,27.9 11.22,22.7 10.22,22.7 9.22,22.7 8.22,22.7
  pour Top (isolate 0.152, no thermals): 0.02,56.9 45.72,56.9 45.72,53.21 48.89,53.21 48.89,3.68 45.72,3.68 45.72,0 0.02,0
  pour Bottom (isolate 0.152, no thermals): 0.02,56.9 45.72,56.9 45.72,53.21 48.89,53.21 48.89,3.68 45.72,3.68 45.72,0 0.02,0
  pour Route2 (isolate 0.152, rank 3, no thermals): 0.02,56.9 45.72,56.9 45.72,53.21 48.39,53.21 48.39,3.68 45.72,3.68 45.72,0 0.02,0
  pour Route15 (isolate 0.152, no thermals): 0.02,56.9 45.72,56.9 45.72,53.21 48.39,53.21 48.39,3.68 45.72,3.68 45.72,0 0.02,0
I2C_V  (via drill 0.2)
  Top 0.152: v42.55,30.9 42.55,31.59 arc-90 42.8,31.84 U1.8 43.05,32.63 arc-45 43.2,32.98 43.41,33.2 arc45 43.56,33.55 43.56,33.83 arc-45 43.71,34.19 44.07,34.55 arc-45 44.42,34.7 47.26,34.7 arc45 47.53,34.81 47.84,35.12 arc-45 48.11,35.23 PCIE-NORTH.B3
  Bottom 0.152: v42.55,30.9 C1.1 R1.1
MGT_CLK0_N  (via drill 0.2)
  Top 0.152: JM1.4 12.07,31.2 11.97,31.3 9.47,31.3 v9.32,31.15
  Bottom 0.152: v9.32,31.15 9.17,31.3 7.32,31.3 arc90 7.17,31.14 7.17,31.08 arc-90 7.02,30.92 6.91,30.92 arc-90 6.76,31.08 6.76,31.14 arc90 6.6,31.3 6.27,31.3 arc90 5.27,30.3 5.27,29.03 C55.2
MGT_CLK0_P  (via drill 0.2)
  Top 0.152: JM1.2 12.07,31.7 11.97,31.6 9.47,31.6 v9.32,31.75
  Bottom 0.152: v9.32,31.75 9.17,31.6 6.27,31.6 arc90 4.97,30.3 4.97,29.03 C54.2
MGT_RX0_N
  Top 0.152: JM1.21 17.37,26.7 17.47,26.8 20.12,26.8 arc90 22.17,28.95 22.17,35.95 22.22,36 U2.27
MGT_RX0_P
  Top 0.152: JM1.19 17.37,27.2 17.47,27.1 18.74,27.1 arc91 18.84,27.2 18.84,27.16 arc-90 18.94,27.27 19.14,27.27 arc-90 19.24,27.16 19.24,27.2 arc91 19.34,27.1 20.12,27.1 arc90 21.87,28.95 21.87,29.05 arc90 21.77,29.15 arc-90 21.67,29.25 21.67,29.45 arc-90 21.77,29.55 arc90 21.87,29.65 21.87,35.95 21.82,36 U2.26
MGT_RX1_N
  Top 0.152: JM1.15 17.37,28.2 17.47,28.3 19.52,28.3 arc90 20.57,29.45 20.57,35.95 20.62,36 U2.23
MGT_RX1_P
  Top 0.152: JM1.13 17.37,28.7 17.47,28.6 18.74,28.6 arc90 18.83,28.69 arc-90 18.91,28.77 19.14,28.77 arc-90 19.23,28.68 arc90 19.31,28.6 19.52,28.6 arc90 20.27,29.45 20.27,30.05 arc90 20.17,30.15 arc-90 20.07,30.25 20.07,30.45 arc-90 20.17,30.55 arc90 20.27,30.65 20.27,35.95 20.22,36 U2.22
MGT_TX0_N  (via drill 0.2)
  Top 0.152: JM1.28 12.07,25.2 11.98,25.29 11.57,25.29 arc90 11.47,25.19 arc-90 11.37,25.1 11.22,25.1 arc-90 11.12,25.2 arc90 11.02,25.3 10.87,25.3 arc90 10.77,25.2 arc-90 10.67,25.1 10.52,25.1 arc-90 10.42,25.2 arc90 10.32,25.3 10.17,25.3 arc90 9.47,24.55 v9.62,24.45 | v18.91,24.45 19.07,24.55 arc-90 20.22,25.6 21.83,25.6 arc90 21.98,25.74 arc-90 22.13,25.89 22.21,25.89 arc-90 22.37,25.74 arc90 22.52,25.6 22.64,25.6 arc45 23.35,25.89 30.57,33.12 arc45 30.87,33.83 30.87,33.98 arc90 30.77,34.08 30.76,34.08 arc-90 30.66,34.18 30.66,34.45 arc-90 30.76,34.55 30.77,34.55 arc90 30.87,34.65 30.87,35.95 30.82,36 U4.6
  Bottom 0.152: v9.62,24.45 9.47,24.35 9.47,24.25 arc90 10.12,23.6 10.32,23.6 arc90 10.42,23.7 arc-90 10.52,23.8 10.67,23.8 arc-90 10.77,23.7 arc90 10.87,23.6 11.02,23.6 arc90 11.12,23.7 arc-90 11.22,23.8 11.37,23.8 arc-90 11.48,23.7 arc90 11.57,23.6 18.22,23.6 arc90 19.07,24.35 v18.91,24.45
MGT_TX0_P  (via drill 0.2)
  Top 0.152: JM1.26 12.07,25.7 11.97,25.6 10.12,25.6 arc90 9.17,24.55 v9.02,24.45 | v19.52,24.45 19.37,24.55 arc-90 20.22,25.3 22.77,25.3 arc45 23.48,25.59 30.88,32.99 arc45 31.17,33.7 31.17,35.95 31.22,36 U4.7
  Bottom 0.152: v9.02,24.45 9.17,24.35 9.17,24.25 arc90 10.12,23.3 18.22,23.3 arc90 19.37,24.35 v19.52,24.45
MGT_TX1_N
  Top 0.152: JM1.22 12.07,26.7 11.97,26.8 9.72,26.8 arc-90 6.87,29.85 6.87,36 6.82,36.05 U3.6
MGT_TX1_P
  Top 0.152: JM1.20 12.07,27.2 11.97,27.1 10.32,27.1 arc-90 10.22,27.2 arc90 10.09,27.33 9.95,27.33 arc90 9.82,27.2 9.82,27.2 arc-90 9.72,27.1 arc-90 7.17,29.85 7.17,30.68 arc-90 7.24,30.75 arc90 7.37,30.88 7.37,31.02 arc90 7.24,31.15 arc-90 7.17,31.22 7.17,36 7.22,36.05 U3.7
N$1
  Bottom 0.152: R4.2 D1.C@1
N$2
  Bottom 0.152: R5.2 D2.C@1
N$3
  Bottom 0.152: R6.2 D3.C@1
N$4
  Bottom 0.152: R7.2 D4.C@1
N$5
  cutout Route2: 17.32,26.55 15.82,26.55 15.82,27.35 17.32,27.35
  cutout Route2: 17.32,28.05 15.82,28.05 15.82,28.85 17.32,28.85
  cutout Route2: 17.32,29.55 15.82,29.55 15.82,30.35 17.32,30.35
  cutout Route2: 17.32,31.05 15.82,31.05 15.82,31.85 17.32,31.85
  cutout Route2: 12.12,30.35 13.62,30.35 13.62,29.55 12.12,29.55
  cutout Route2: 12.12,28.85 13.62,28.85 13.62,28.05 12.12,28.05
  cutout Route2: 12.12,27.35 13.62,27.35 13.62,26.55 12.12,26.55
  cutout Route2: 12.12,25.85 13.62,25.85 13.62,25.05 12.12,25.05
  cutout Route2: 12.12,31.85 13.62,31.85 13.62,31.05 12.12,31.05
  cutout Route2: 34.12,24.35 35.62,24.35 35.62,23.55 34.12,23.55
  cutout Route2: 34.12,36.85 35.62,36.85 35.62,36.05 34.12,36.05
  cutout Route2: 34.12,34.85 35.62,34.85 35.62,34.05 34.12,34.05
  cutout Route2: 37.82,33.35 39.32,33.35 39.32,32.55 37.82,32.55
  cutout Route2: 37.82,31.35 39.32,31.35 39.32,30.55 37.82,30.55
  cutout Route2: 37.82,35.85 39.32,35.85 39.32,35.05 37.82,35.05
  cutout Route2: 37.82,37.85 39.32,37.85 39.32,37.05 37.82,37.05
  cutout Route2: 37.82,27.85 39.32,27.85 39.32,27.05 37.82,27.05
  cutout Route2: 37.82,25.85 39.32,25.85 39.32,25.05 37.82,25.05
  cutout Route2: 34.12,26.85 35.62,26.85 35.62,26.05 34.12,26.05
  cutout Route2: 34.12,28.85 35.62,28.85 35.62,28.05 34.12,28.05
  cutout Route2: 34.12,30.35 35.62,30.35 35.62,29.55 34.12,29.55
  cutout Route2: 34.12,32.35 35.62,32.35 35.62,31.55 34.12,31.55
  cutout Route2: 7.42,43.65 7.02,43.65 7.02,44.45 7.42,44.45
  cutout Route15: 7.62,42.45 7.22,42.45 7.22,43.25 7.62,43.25
  cutout Route15: 5.22,42.45 4.82,42.45 4.82,43.25 5.22,43.25
  cutout Route2: 29.42,43.65 29.02,43.65 29.02,44.45 29.42,44.45
  cutout Route15: 31.62,42.05 31.22,42.05 31.22,42.85 31.62,42.85
  cutout Route15: 29.22,42.05 28.82,42.05 28.82,42.85 29.22,42.85
N$6
  cutout Route15: 4.76,28.4 4.76,28.9 4.98,28.9 4.98,28.4
  cutout Route15: 5.26,28.4 5.26,28.9 5.48,28.9 5.48,28.4
  cutout Route15: 4.87,27.76 5.37,27.76 5.37,27.54 4.87,27.54
  cutout Route15: 4.2,25.3 4.2,26.3 5.09,26.3 5.09,25.3
  cutout Route15: 5.47,25.3 5.47,26.3 5.97,26.3 5.97,25.3
N$7
  Top 0.152: U2.40 23.82,41.65 C3.2
N$8
  Top 0.152: U2.39 23.82,41.25 C3.1
N$9
  Top 0.152: U3.40 3.5,37.25 C21.2
N$10
  Top 0.152: U3.39 3.5,37.65 C21.1
N$11  (via drill 0.2)
  Top 0.178: U2.30 24.02,37.65 v24.22,37.85
  Bottom 0.203: C6.1 v24.22,37.85
N$12  (via drill 0.2)
  Top 0.178: U2.34 24.02,39.25 v24.22,39.45
  Bottom 0.203: C5.1 v24.22,39.45
N$13
  Bottom 0.203: C18.2 R9.1
N$14  (via drill 0.2)
  Top 0.152: U3.22 7.22,41.85 v7.02,41.65
  Bottom 0.178: C18.1 7.42,41.9 arc-90 7.17,41.65 v7.02,41.65
N$15
  Top 0.178: U3.23 6.82,42.59 arc-45 6.89,42.77 7.07,42.95 arc45 7.22,43.3 C19.1
N$16
  Top 0.178: C19.2 R10.1
N$17  (via drill 0.2)
  Top 0.152: U3.26 5.62,41.85 v5.42,41.65
  Bottom 0.203: v5.42,41.65 5.27,41.65 arc-90 5.02,41.9 C20.1
N$18
  Bottom 0.203: R11.1 C20.2
N$19
  Bottom 0.178: R8.1 C4.2
N$20  (via drill 0.2)
  Top 0.178: U2.3 21.82,42.85 v21.62,43.05
  Bottom 0.178: C4.1 21.92,42.75 v21.62,43.05
N$21  (via drill 0.2)
  Top 0.152: U3.30 3.42,41.25 v3.22,41.05
  Bottom 0.203: C24.1 v3.22,41.05
N$22  (via drill 0.2)
  Top 0.152: U3.34 3.42,39.65 v3.22,39.45
  Bottom 0.203: C23.1 v3.22,39.45
N$23
  Top 0.178: U3.27 5.22,45.63 arc-45 5.51,46.34 8.93,49.75 arc45 9.22,50.46
  Top 0.203: 9.22,50.46 C17.1
N$24  (via drill 0.2)
  Top 0.152: U3.5 6.42,37.05 v6.62,37.25
  Bottom 0.203: C22.1 v6.62,37.25
N$25
  Top 0.203: C17.2 X2.1
N$34  (via drill 0.2)
  Top 0.152: U3.32 2.22,40.45 1.72,39.95 1.72,22.05 v2.12,21.65
  Bottom 0.152: v2.12,21.65 3.72,20.05 8.12,20.05 9.32,18.85
N$35
  Top 0.178: U4.23 30.82,42.6 arc-45 30.89,42.78 31.08,42.98 arc43 31.22,43.33 31.22,47.63 arc-45 31.51,48.34 32.93,49.75 arc45 33.22,50.46 C35.1
N$36
  cutout Top: 23.32,57.05 19.12,57.05 19.12,52.06 arc45 19.41,51.36 21.12,49.65 22.12,49.65 22.07,49.7 arc-45 21.92,50.06 arc-45 22.06,50.38 23.03,51.36 arc45 23.32,52.06
  cutout Route2: 23.32,57.05 19.12,57.05 19.12,52.06 arc45 19.41,51.36 20.72,50.05 21.92,50.05 arc-45 22.06,50.38 23.03,51.36 arc45 23.32,52.06
N$37
  Top 0.178: U2.2 22.23,44.94 22.23,48.62 arc45 21.94,49.33 21.51,49.75 arc-45 21.22,50.46
  Top 0.203: 21.22,50.46 C2.2
N$38
  Top 0.203: C2.1 X1.1
N$57
  cutout Top: 7.12,57.05 11.32,57.05 11.32,52.06 arc-45 11.03,51.36 9.32,49.65 8.32,49.65 8.37,49.7 arc45 8.52,50.06 arc45 8.38,50.38 7.41,51.36 arc-45 7.12,52.06
  cutout Route2: 7.12,57.05 11.32,57.05 11.32,52.06 arc-45 11.03,51.36 9.72,50.05 8.72,50.05 8.52,50.06 arc45 8.38,50.38 7.41,51.36 arc-45 7.12,52.06
  cutout Route2: 31.12,57.05 35.32,57.05 35.32,52.06 arc-45 35.03,51.36 33.72,50.05 32.72,50.05 32.52,50.06 arc45 32.38,50.38 31.41,51.36 arc-45 31.12,52.06
N$59
  Top 0.203: C35.2 X3.1
N$63
  cutout Top: 31.12,57.05 35.32,57.05 35.32,52.06 arc-45 35.03,51.36 33.32,49.65 32.32,49.65 32.37,49.7 arc45 32.52,50.06 arc45 32.38,50.38 31.41,51.36 arc-45 31.12,52.06
N$78
  Top 0.152: 27.5,37.25 C39.2
  Top 0.178: U4.40 27.5,37.25
N$81  (via drill 0.2)
  Top 0.152: U4.32 26.62,40.45 25.92,39.75 25.92,31.85 v26.12,31.65
  Bottom 0.152: v26.12,31.65 28.72,29.05 28.72,24.45 23.32,19.05
N$83  (via drill 0.2)
  Top 0.152: U4.13 v33.22,38.85
N$90  (via drill 0.2)
  Top 0.178: U4.5 30.42,37.05 v30.62,37.25
  Bottom 0.203: C40.1 v30.62,37.25
N$91  (via drill 0.2)
  Top 0.152: U4.34 27.42,39.65 v27.22,39.45
  Bottom 0.203: C41.1 v27.22,39.45
N$92  (via drill 0.2)
  Top 0.178: U4.30 27.42,41.25 v27.22,41.05
  Bottom 0.203: C42.1 v27.22,41.05
N$93
  Bottom 0.203: R14.1 C38.2
N$94  (via drill 0.2)
  Top 0.178: U4.26 29.62,41.85 v29.42,41.65
  Bottom 0.203: v29.42,41.65 29.27,41.65 arc-90 29.02,41.9 C38.1
N$95
  Top 0.178: C37.2 R13.1
N$96
  Top 0.178: C37.1 U4.27
N$97  (via drill 0.2)
  Top 0.178: U4.22 31.22,41.85 v31.02,41.65
  Bottom 0.178: C36.1 31.42,41.9 arc-90 31.17,41.65 v31.02,41.65
N$98
  Bottom 0.203: C36.2 R12.1
N$99
  Top 0.152: 27.5,37.65 C39.1
  Top 0.178: U4.39 27.5,37.65
N$216  (via drill 0.2)
  Top 0.152: U1.7 v43.56,32.61
  Bottom 0.152: R2.1 R1.2 44.14,32.35 arc90 43.88,32.61 v43.56,32.61
N_PCIE_V
  Top 0.61: PCIE-NORTH.B13 45.43,47.24
OUT_N
  Bottom 0.152: U5.5 5.72,26.65 5.4,26.97 R15.2 5.4,28.34 C55.1
OUT_P
  Bottom 0.152: 4.72,25.87 U5.4 4.64,25.91 4.84,26.11 R15.1 4.84,28.34 C54.1
S_PCIE_V
  Top 0.61: PCIE-SOUTH.B13 44.47,18.66
SCL
  Top 0.152: U1.6 44.07,33.73 arc-90 44.58,34.23 PCIE-NORTH.B2
SDA
  Top 0.152: U1.5 44.57,33.55 arc-90 44.83,33.8 47.24,33.8 arc-45 47.51,33.69 47.86,33.35 arc45 48.13,33.23 PCIE-NORTH.B1
VCC_4  (via drill 0.2)  (3 unrouted)
  Top 0.152: 23.72,39.65 24.12,40.05 v24.22,40.05
  Top 0.178: U2.4 v21.42,41.65 | U2.35 23.72,39.65
  Bottom 0.203: C13.1 v24.22,40.05 | C12.1 v21.42,41.65
VCC_8  (via drill 0.2)  (3 unrouted)
  Top 0.152: U3.4 v6.02,37.25 | U3.35 3.72,39.25 3.32,38.85 v3.22,38.85
  Bottom 0.203: C31.1 v3.22,38.85 | C30.1 v6.02,37.25
VCC_9  (via drill 0.2)  (3 unrouted)
  Top 0.178: U4.4 v30.02,37.25 | U4.35 27.72,39.25 27.32,38.85 v27.22,38.85
  Bottom 0.203: C49.1 v27.22,38.85 | C48.1 v30.02,37.25
VCCIO15  (via drill 0.33)
  Top 0.254: JM2.54 v33.32,24.7
VCCIO34  (via drill 0.25)
  Top 0.254: JM1.61 v15.32,16.7
VCCO_4  (via drill 0.2)  (3 unrouted)
  Top 0.178: U2.24 21.02,37.15 v20.92,37.25 | U2.25 21.42,37.15 v21.52,37.25
  Bottom 0.203: C16.1 v21.52,37.25 | C15.1 v20.92,37.25
VCCO_8  (via drill 0.2)  (3 unrouted)
  Top 0.178: U3.25 6.02,42.95 v5.92,43.05 | U3.24 6.42,42.95 v6.52,43.05
  Bottom 0.178: C33.1 v5.92,43.05
  Bottom 0.203: C34.1 v6.52,43.05
VCCO_9  (via drill 0.2)  (3 unrouted)
  Top 0.178: U4.25 30.02,42.95 v29.92,43.05 | U4.24 30.42,42.95 v30.52,43.05
  Bottom 0.178: C51.1 v29.92,43.05
  Bottom 0.203: C52.1 v30.52,43.05
VDD_4  (via drill 0.2)  (4 unrouted)
  Top 0.178: U2.20 v18.22,37.25 | U2.16 v18.22,38.85 | U2.29 v24.22,37.25
  Bottom 0.203: C9.1 v24.22,37.25 | C8.1 v18.22,37.25 | C10.1 v18.22,38.85
VDD_8  (via drill 0.2)  (4 unrouted)
  Top 0.152: U3.16 v9.22,40.05 | U3.20 v9.22,41.65 | U3.29 v3.22,41.65
  Bottom 0.203: v9.22,41.65 C27.1 | v9.22,40.05 C28.1 | C26.1 v3.22,41.65
VDD_9  (via drill 0.2)  (4 unrouted)
  Top 0.178: U4.16 v33.22,40.05 | U4.20 v33.22,41.65 | U4.29 v27.22,41.65
  Bottom 0.203: v33.22,41.65 C45.1 | v33.22,40.05 C46.1 | C44.1 v27.22,41.65
VIN  (via drill 0.51)  (1 unrouted)
  Top 0.203: JM1.99 17.92,7.2 | JM1.97 17.42,7.7 18.22,6.9
  Top 0.813: 18.22,3.95 v18.22,6.45 18.22,6.9 17.92,7.2
VXX  (2 unrouted)
  Bottom 0.305: 6.72,25.87 U5.6

## Text on the board
_tsilk: V0.6 / R1.0 | VIN | TMS | TDI | TDO | TCK | GND | VDD
_bsilk: Trenz TE0714 SDI / Dual Plugin Module | Copyright (C) 2017 Herbert Pötzl / Licensed under CERN OHL v.1.2
bEngrave: AXIOM BETA DPM TRENZ SDI / BOTTOM SIDE V0.6 R1.0